# EAGLE board MasterPCB_Rev_1 (EAGLE 9.6.2), part 1 of 5
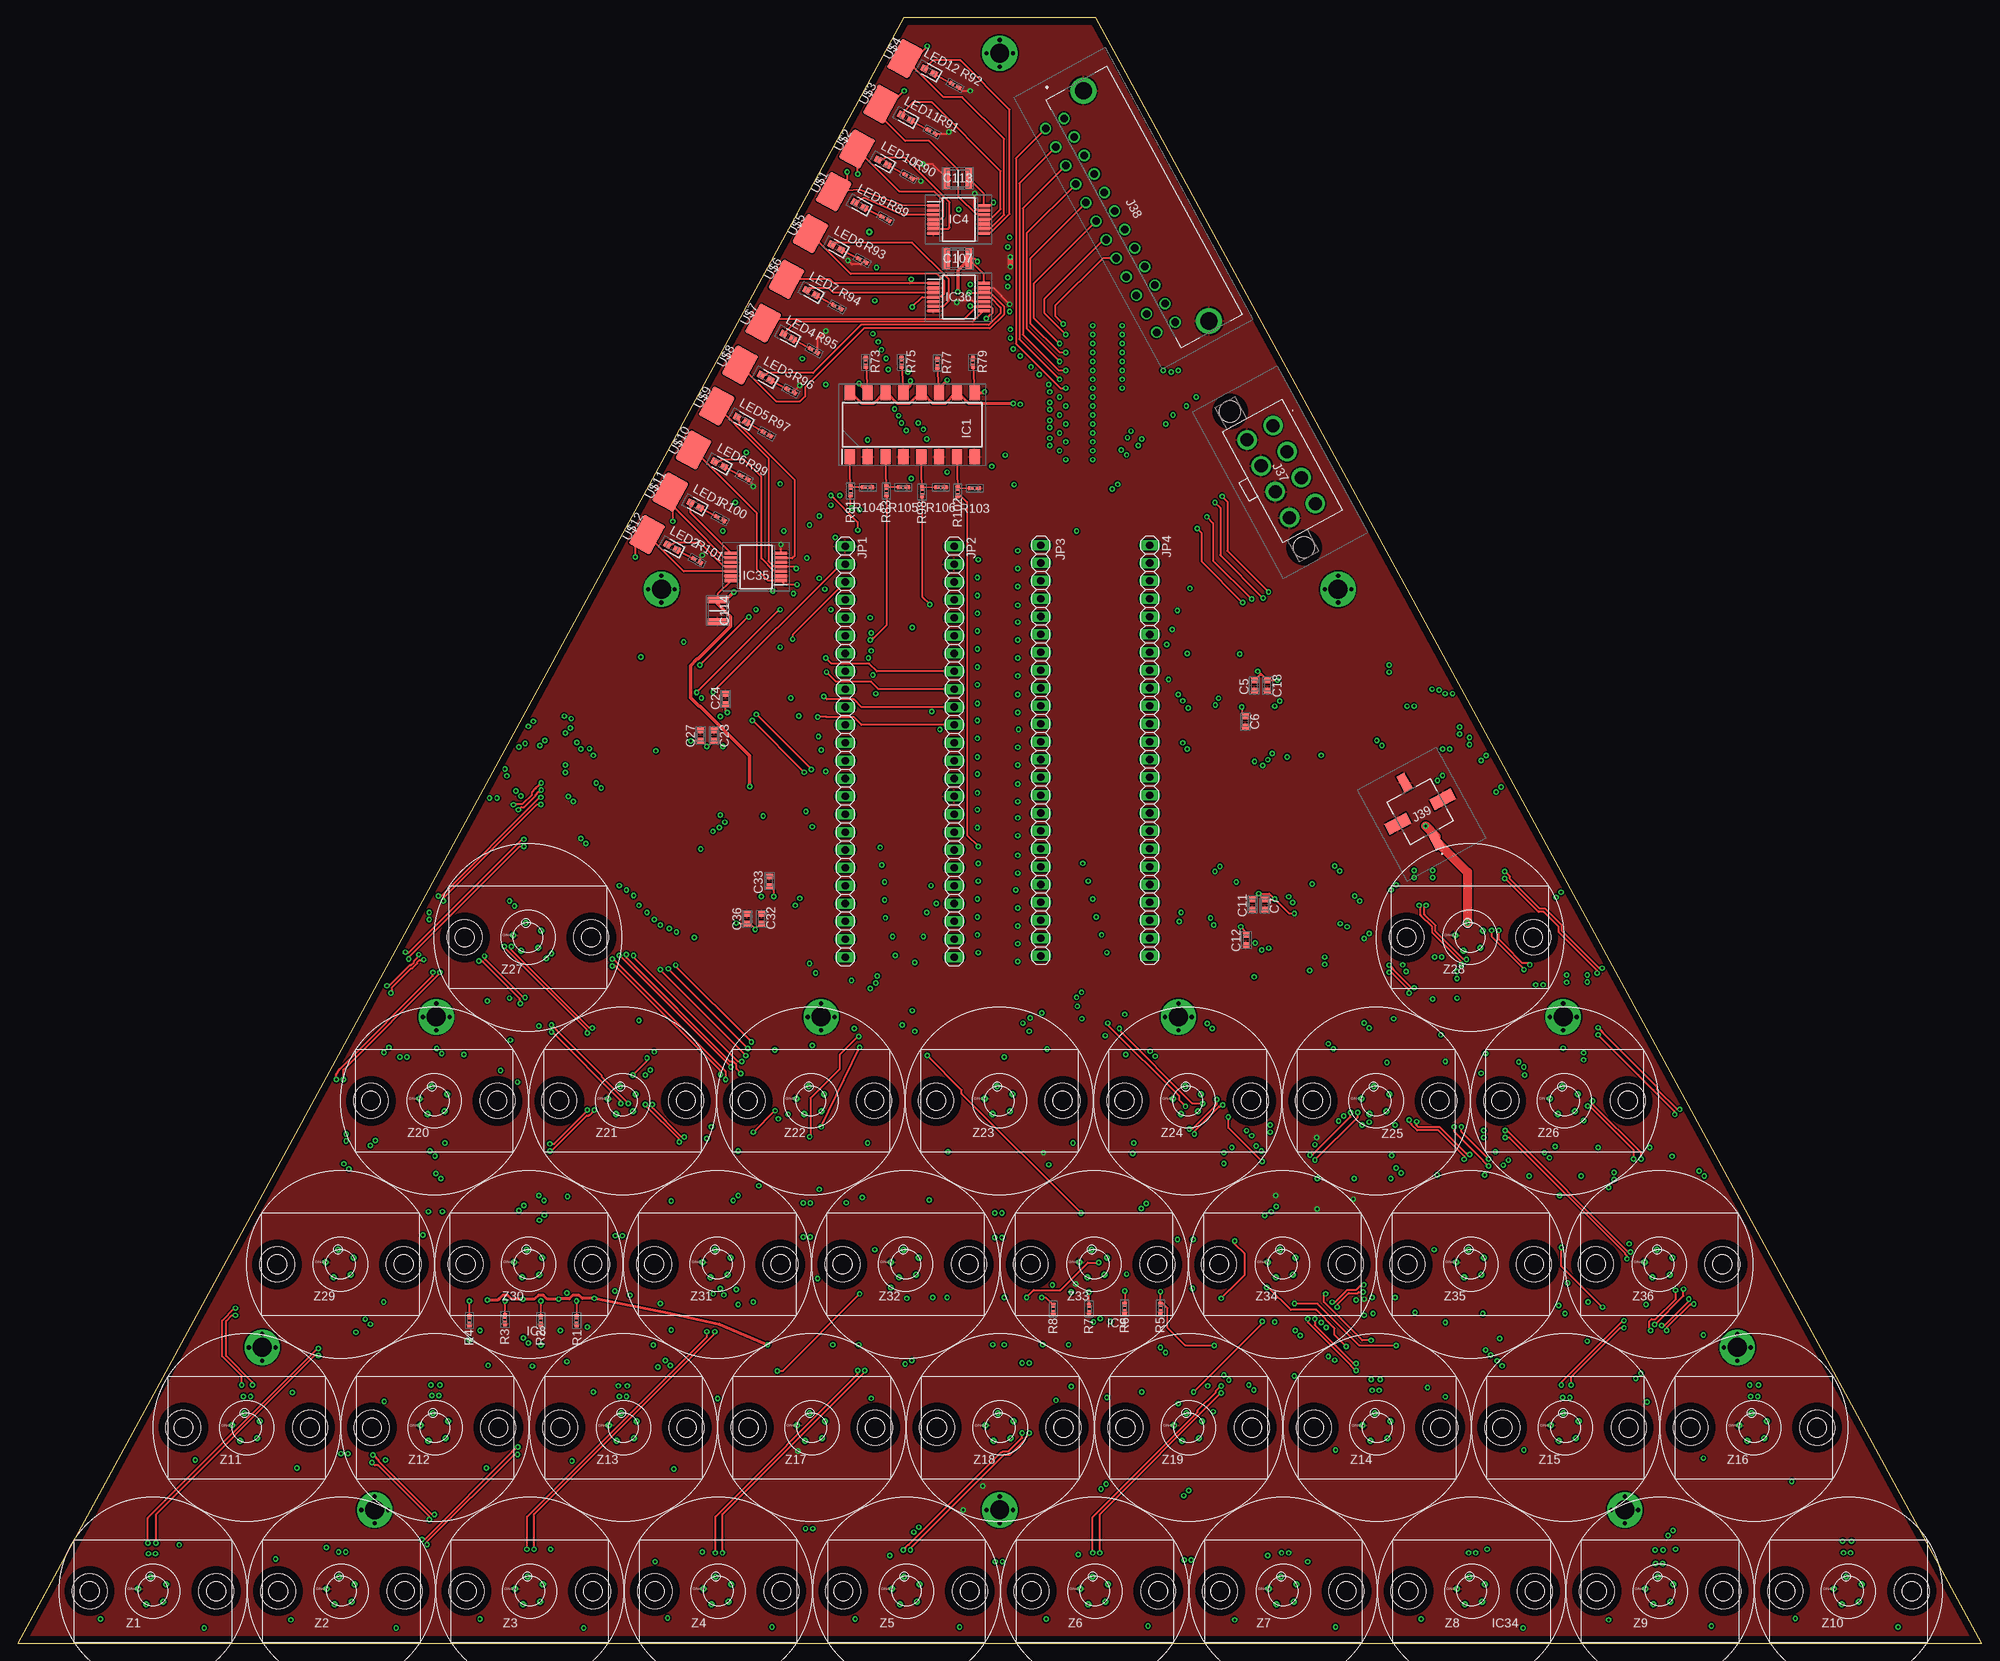
[diagram p0: board, top side]
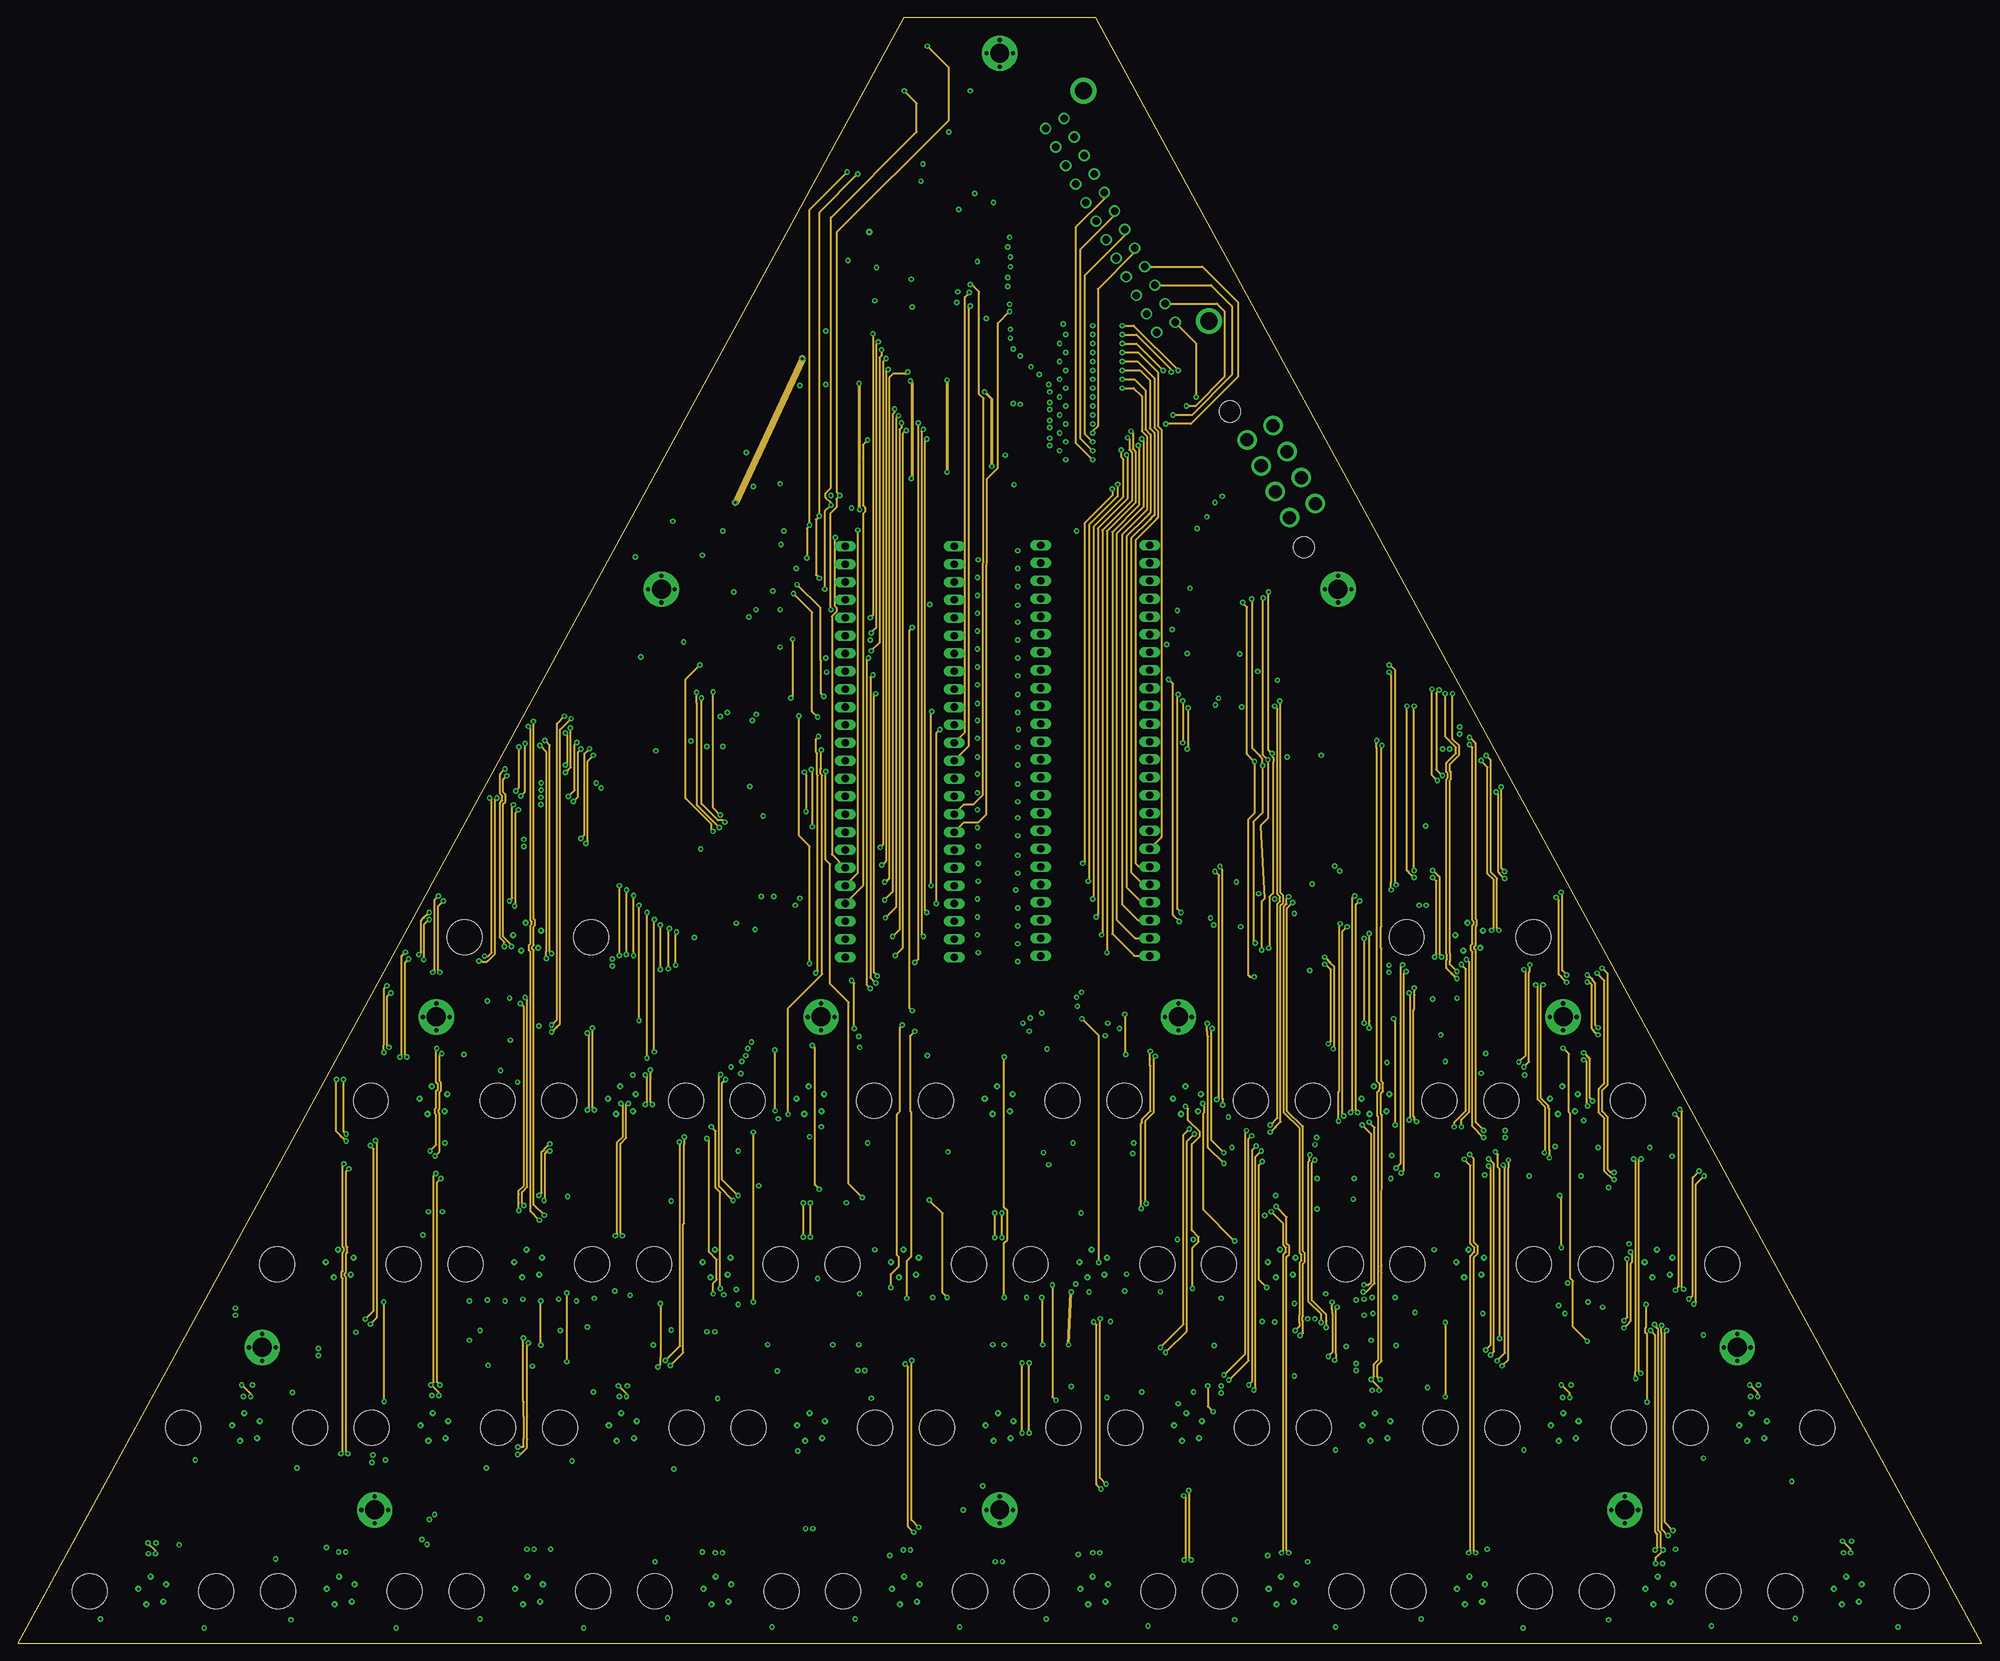
[diagram p1: board, inner layer Route2]
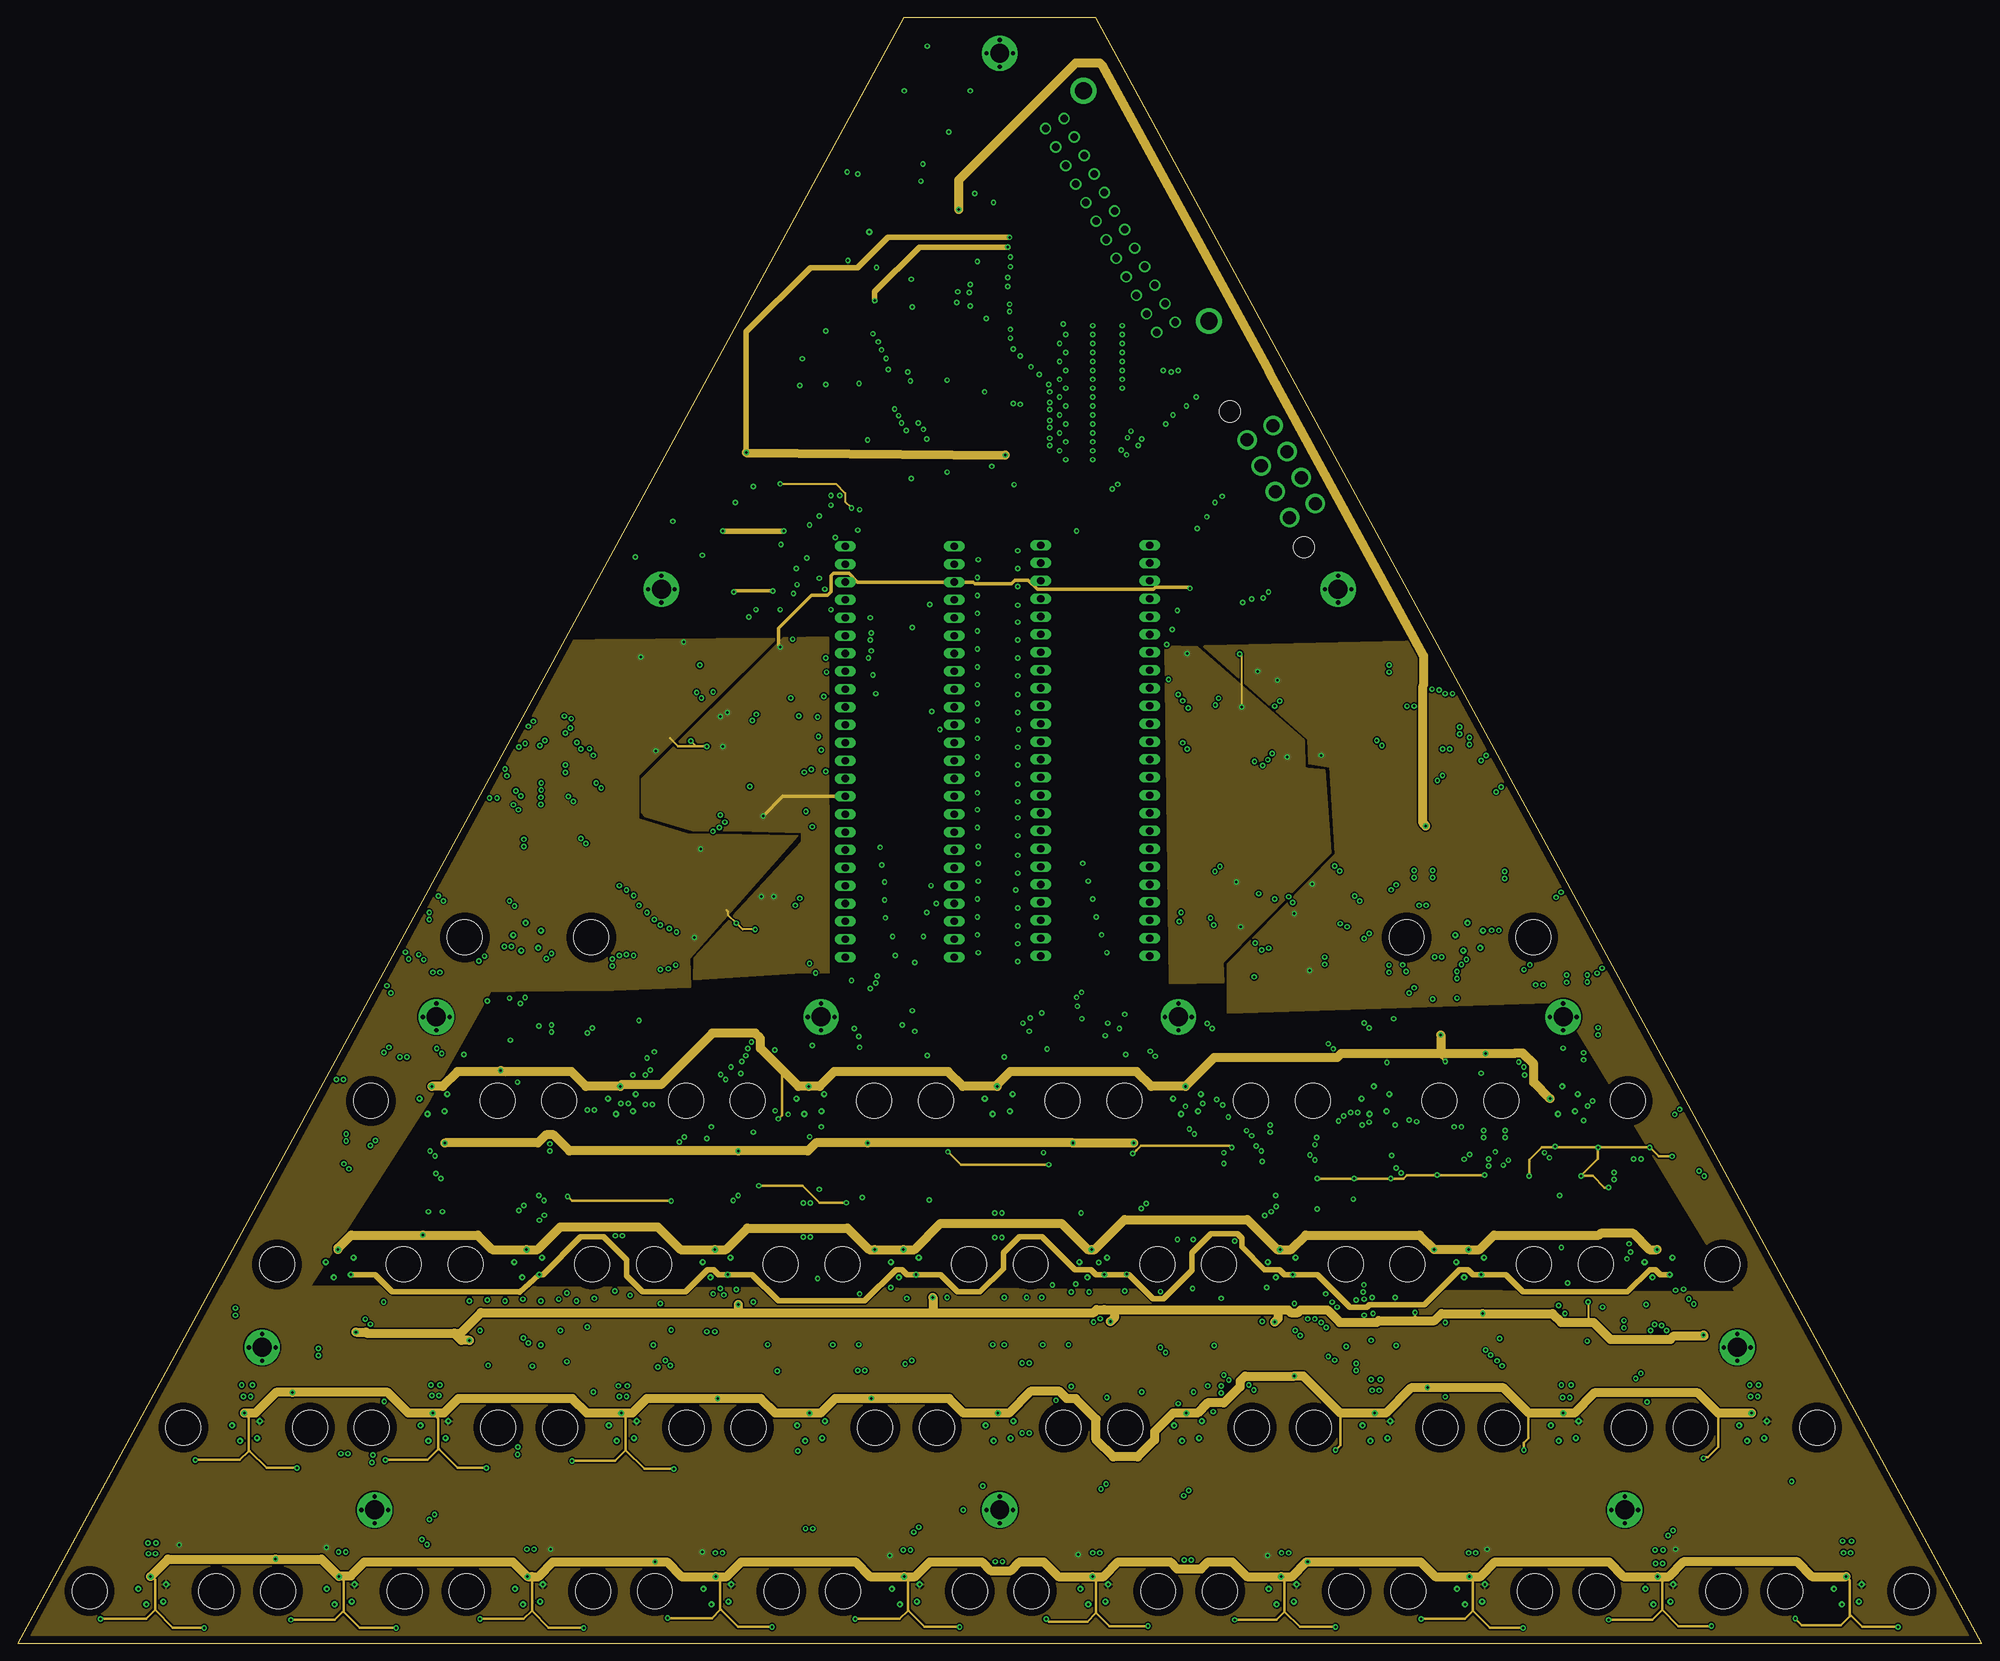
[diagram p2: board, inner layer Route3]
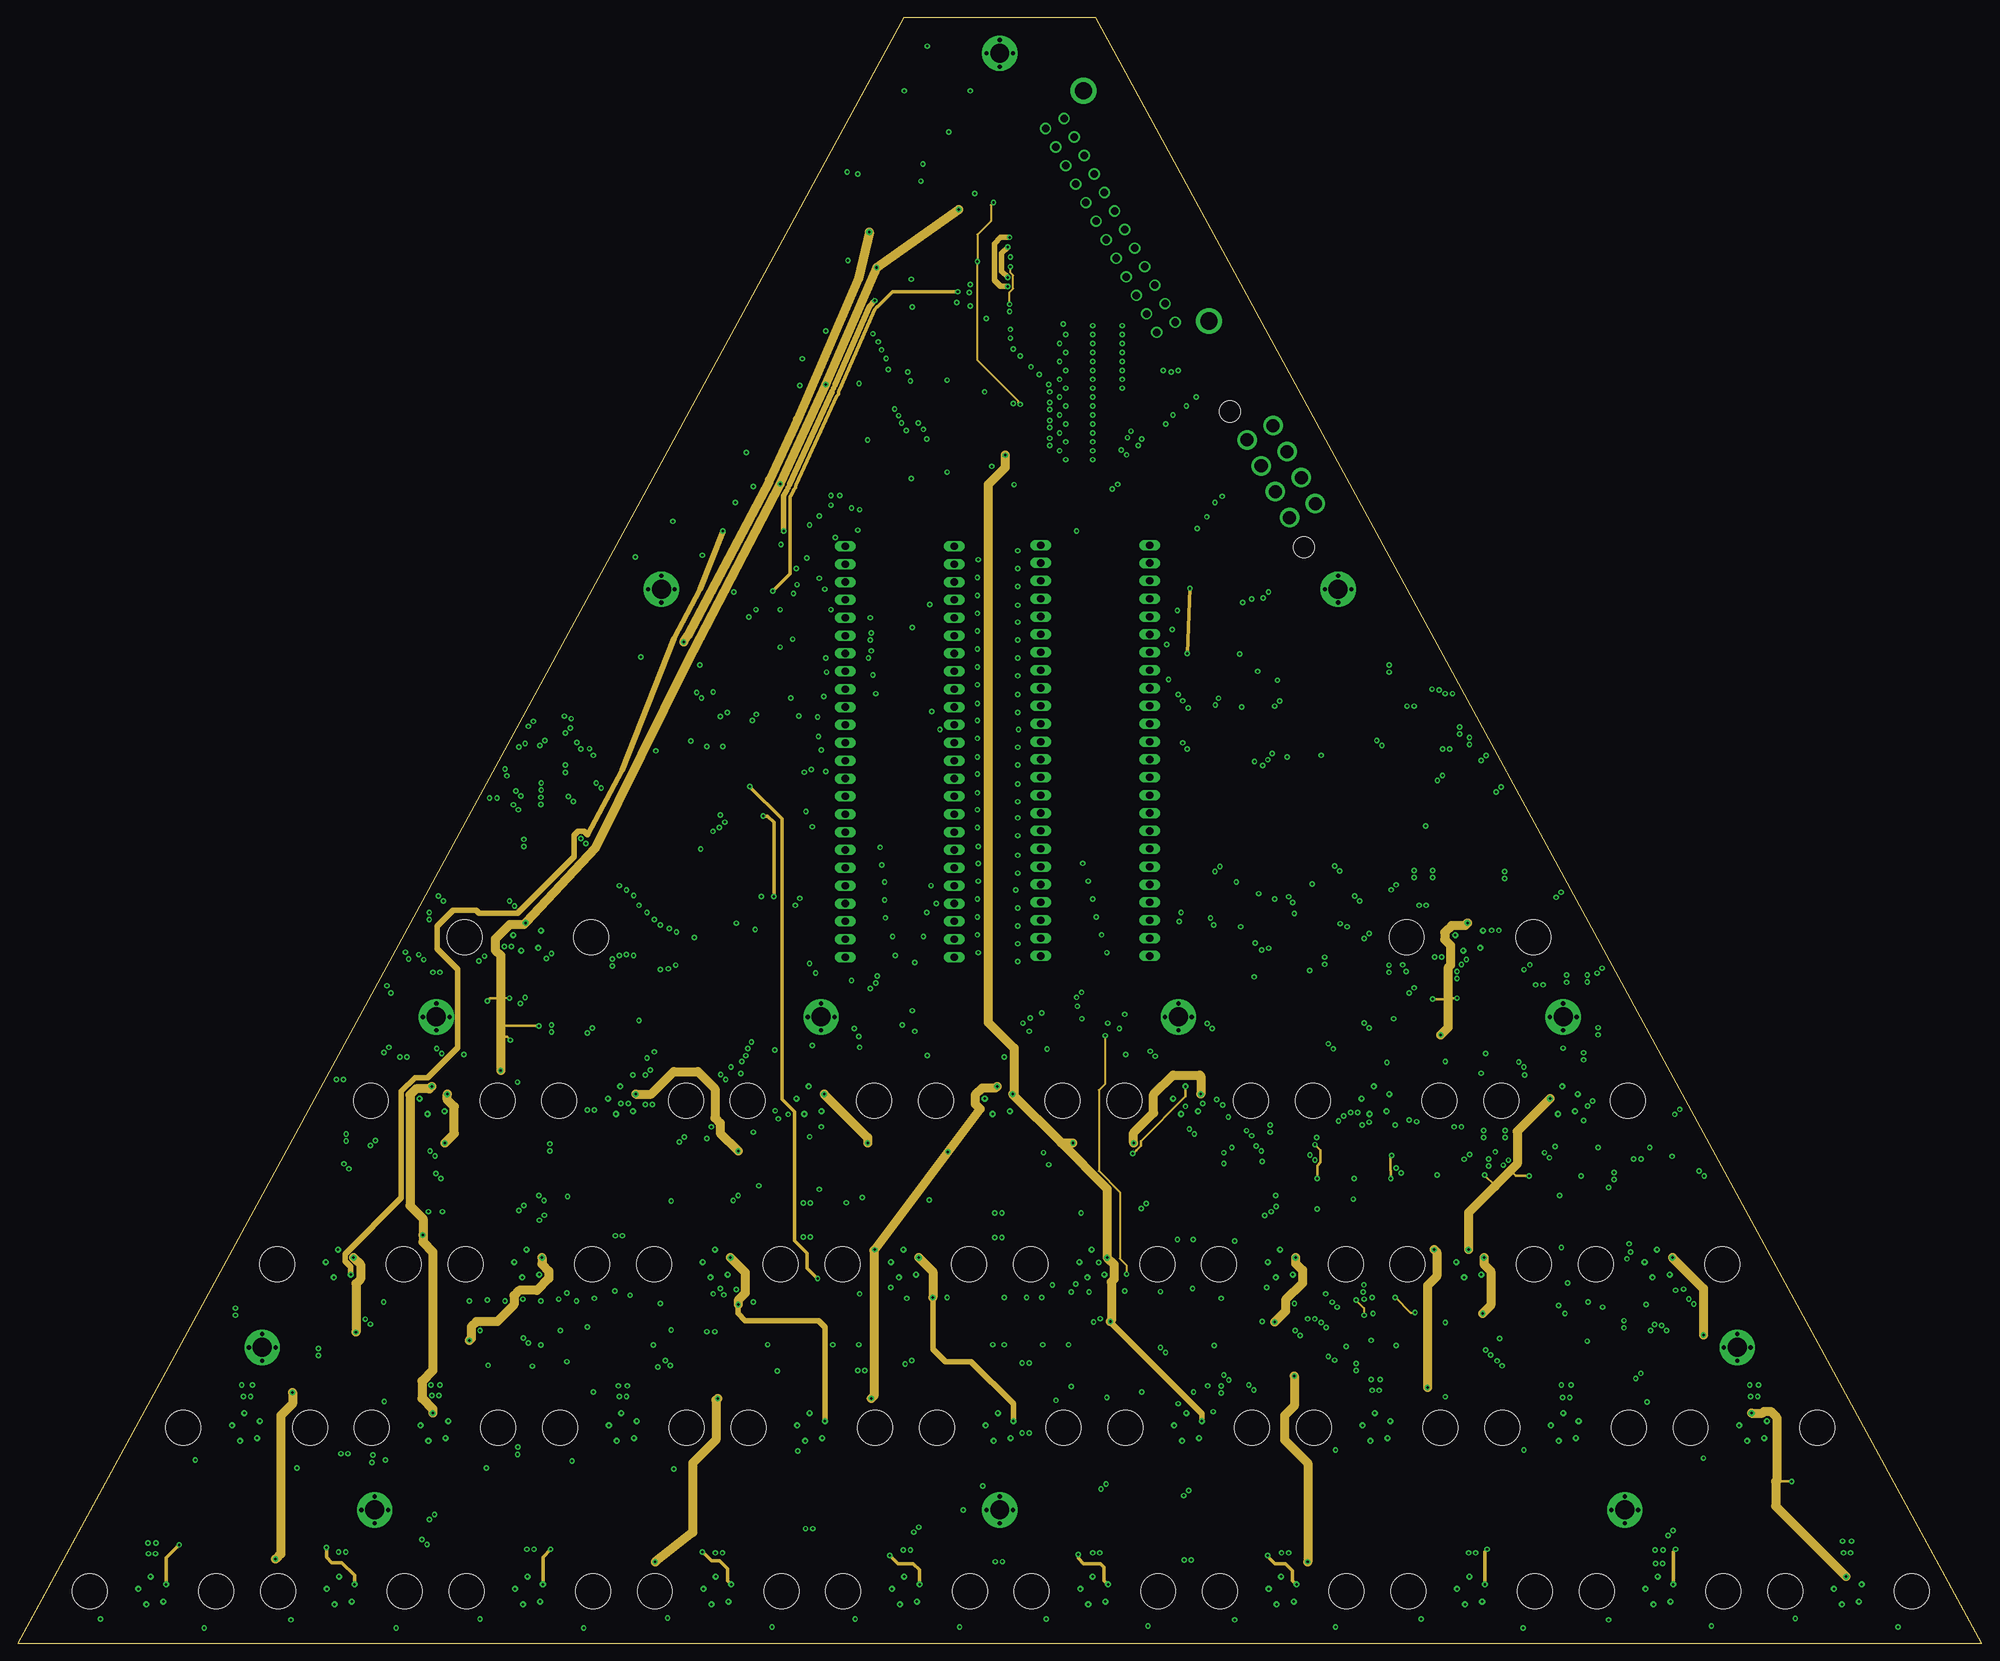
[diagram p3: board, inner layer Route14]
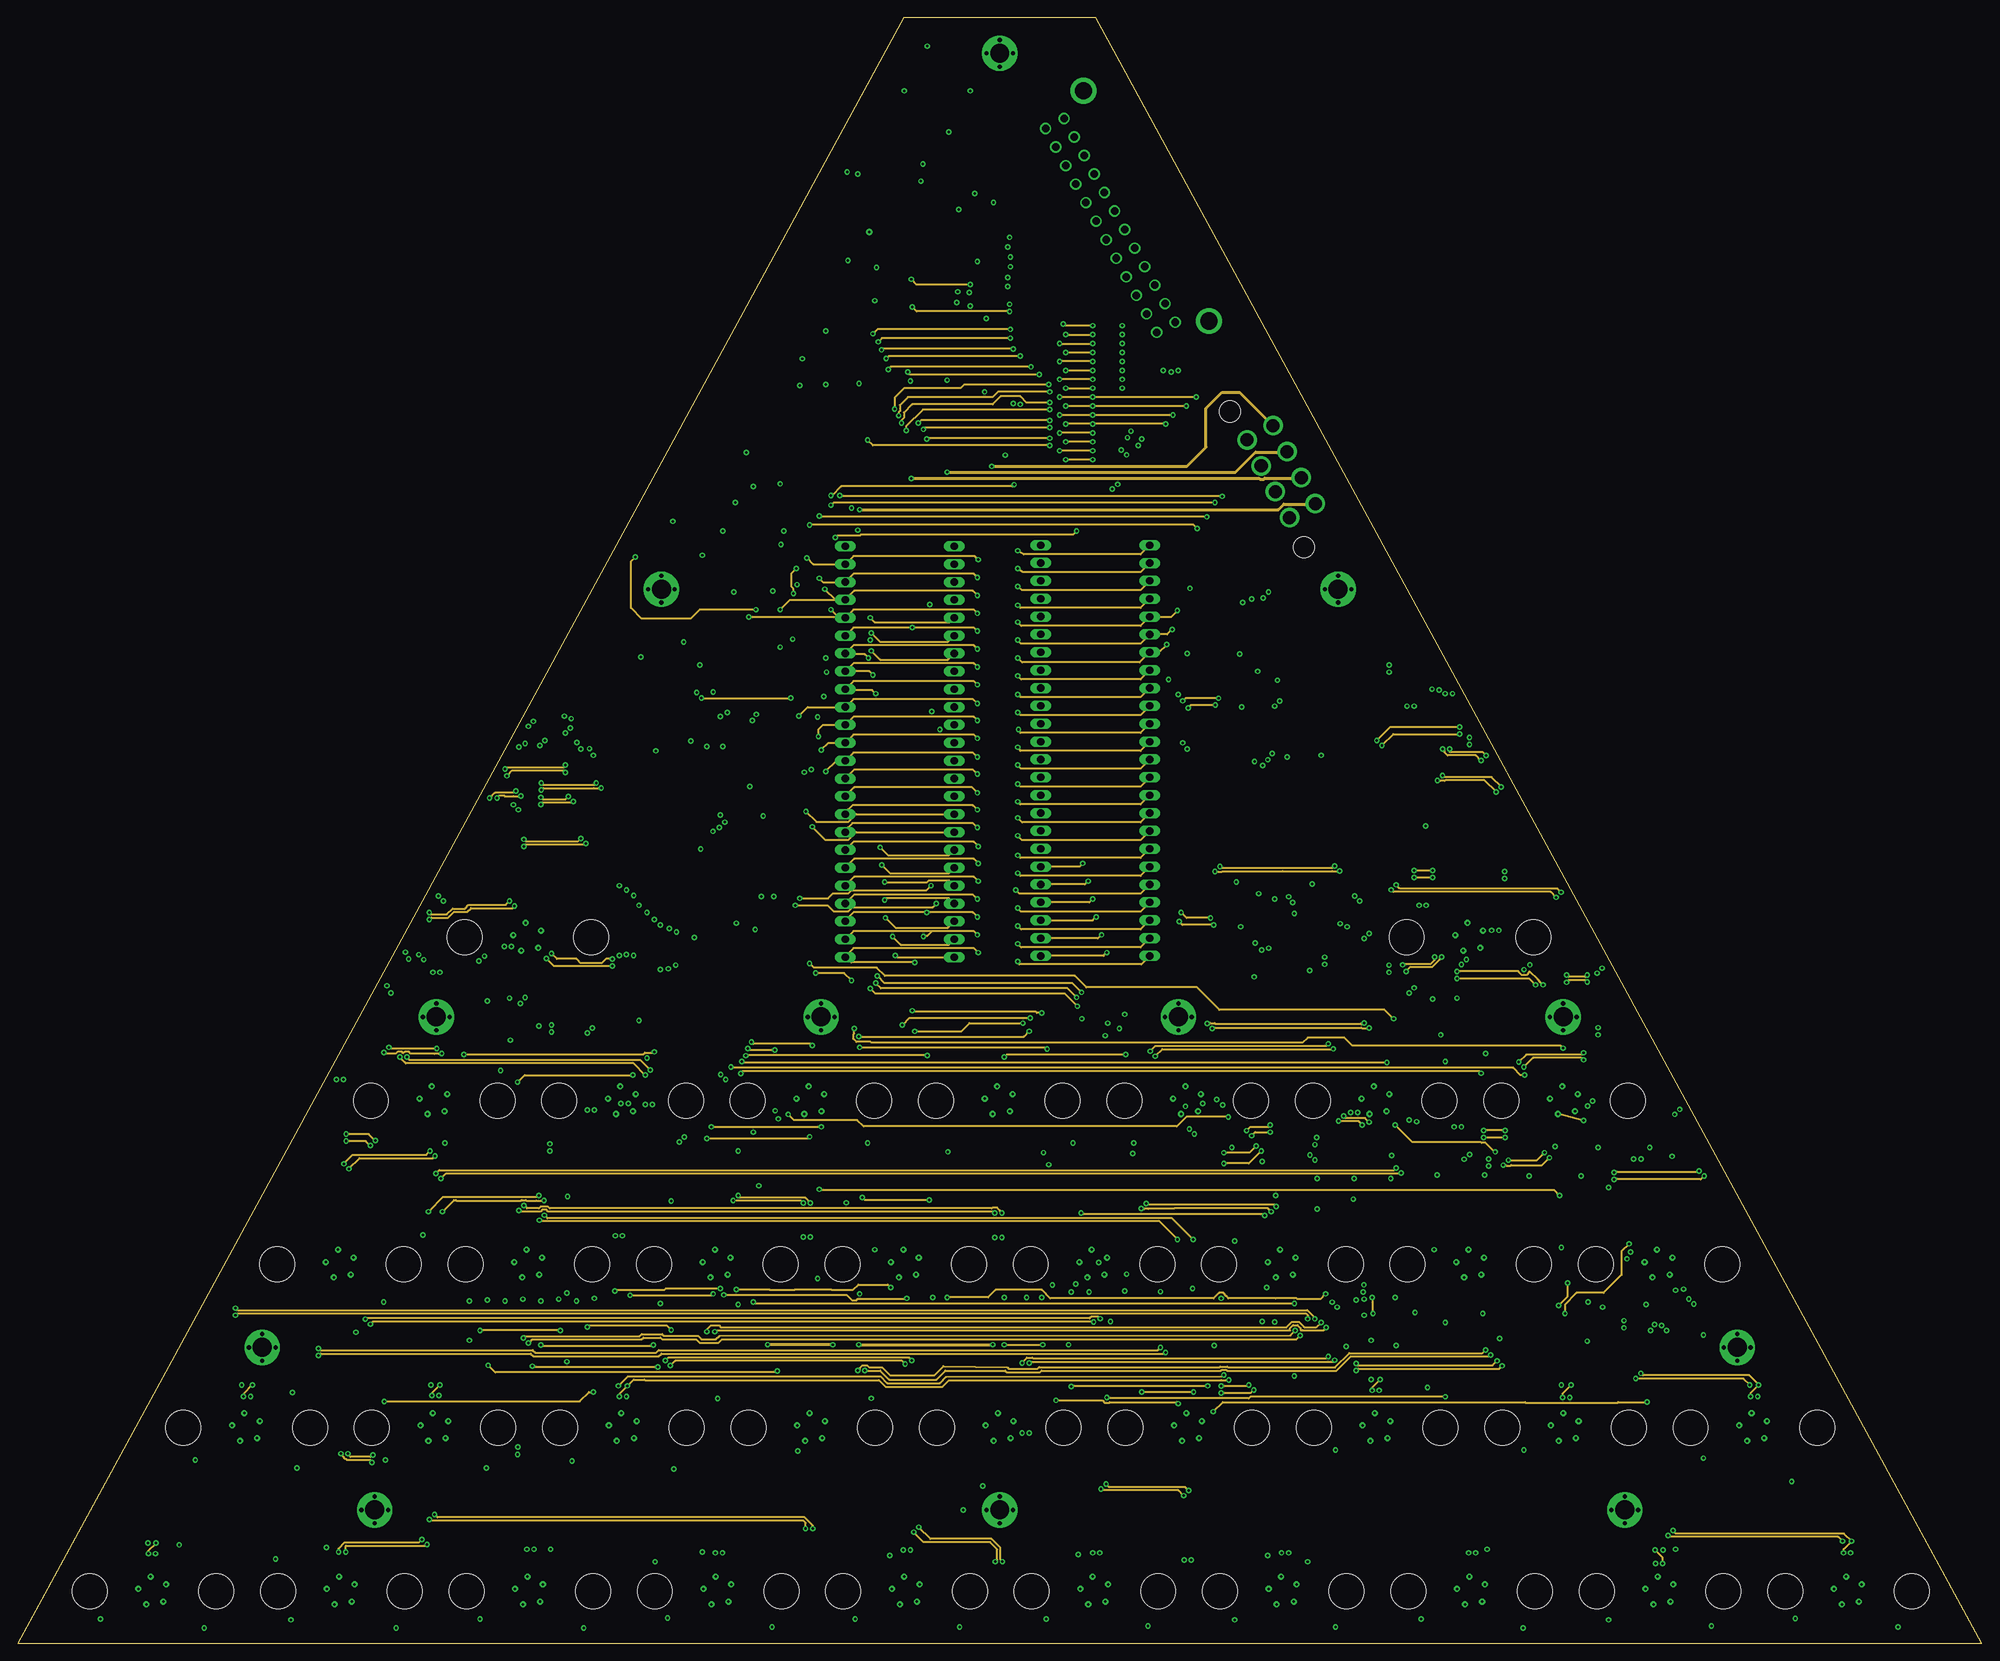
[diagram p4: board, inner layer Route15]
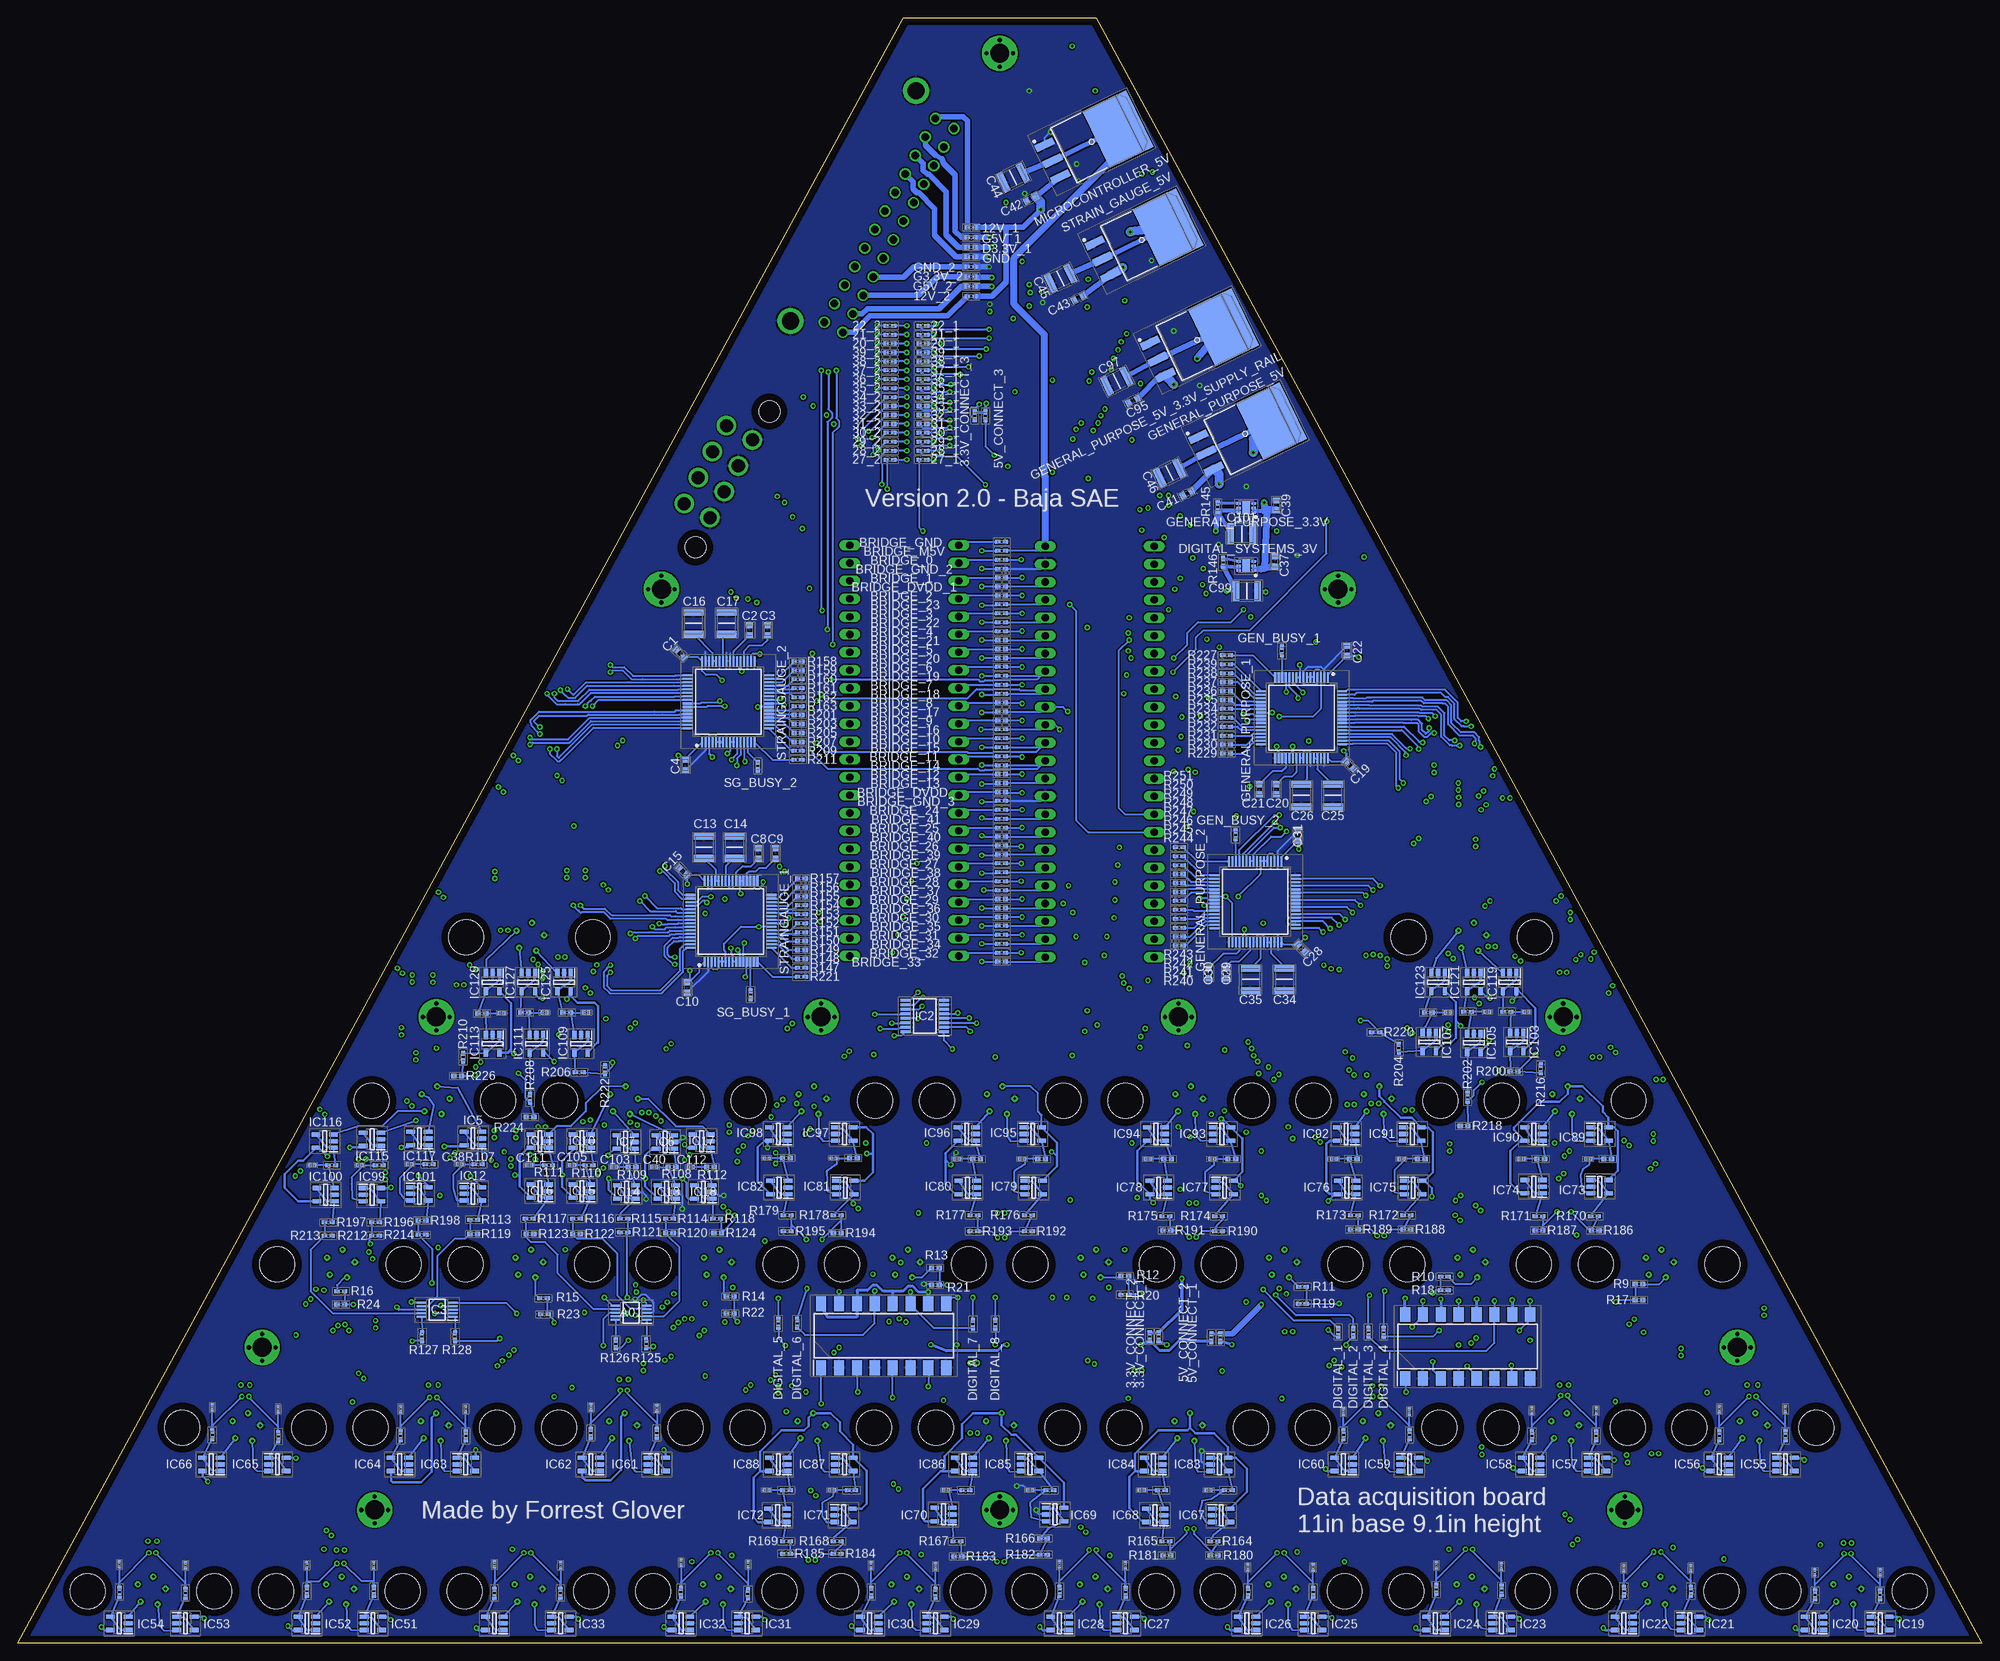
[diagram p5: board, bottom side, seen from below]

Size 279.4 x 231.14 mm. Coordinates in mm from the lower left corner, seen from the top.
Outline: 0,0 279.4,0 153.42,231.14 125.98,231.14 0,0
Copper layers (1+2*3+14*15+16): Top 0.035mm / dielectric 0.1mm / Route2 0.0175mm / dielectric 0.665mm / Route3 0.0175mm / dielectric 0.2mm / Route14 0.0175mm / dielectric 0.665mm / Route15 0.0175mm / dielectric 0.1mm / Bottom 0.035mm
Design rules "default *": minimum track width 10mil, minimum drill 0.35mm, track to track 8mil, track to pad 8mil, pad to pad 6mil, via to via 10mil, smd to smd 6mil, copper to edge 40mil, drill to drill 6mil, minimum pad ring 10mil, minimum via ring 8mil, stop-mask expansion 4mil, vias tented up to drill 15mil, thermal gap 10mil

## Footprints (pad centres in the part's own frame; a part is rotated, then mirrored left to right if it is on the bottom)
RESC1005X40N = smd 0.75 x 0.6: 1 -0.55,0; 2 0.55,0
SOP50P490X110-10N = smd 1.4 x 0.3: 1 -2.2,1; 2 -2.2,0.5; 3 -2.2,0; 4 -2.2,-0.5; 5 -2.2,-1; 6 2.2,-1; 7 2.2,-0.5; 8 2.2,0; 9 2.2,0.5; 10 2.2,1
CAPC1608X90N = smd 0.78 x 0.99: 1 -0.7,0; 2 0.7,0
CAPC3225X230N = smd 0.92 x 2.82: 1 -1.54,0; 2 1.54,0
CAPC0603X33N = smd 0.47 x 0.44: 1 -0.335,0; 2 0.335,0
SON65P200X200X80-7N = smd 0.65 x 0.35: 1 -1.05,0.65; 2 -1.05,0; 3 -1.05,-0.65; 4 1.05,-0.65; 5 1.05,0; 6 1.05,0.65 | smd 1.1 x 1.7: 7 0,0
QFP50P1200X1200X160-64N = smd 1.475 x 0.3: 1 -5.738,3.75; 2 -5.738,3.25; 3 -5.738,2.75; 4 -5.738,2.25; 5 -5.738,1.75; 6 -5.738,1.25; 7 -5.738,0.75; 8 -5.738,0.25; 9 -5.738,-0.25; 10 -5.738,-0.75; 11 -5.738,-1.25; 12 -5.738,-1.75; 13 -5.738,-2.25; 14 -5.738,-2.75; 15 -5.738,-3.25; 16 -5.738,-3.75; 33 5.738,-3.75; 34 5.738,-3.25; 35 5.738,-2.75; 36 5.738,-2.25; 37 5.738,-1.75; 38 5.738,-1.25; 39 5.738,-0.75; 40 5.738,-0.25; 41 5.738,0.25; 42 5.738,0.75; 43 5.738,1.25; 44 5.738,1.75; 45 5.738,2.25; 46 5.738,2.75; 47 5.738,3.25; 48 5.738,3.75 | smd 0.3 x 1.475: 17 -3.75,-5.738; 18 -3.25,-5.738; 19 -2.75,-5.738; 20 -2.25,-5.738; 21 -1.75,-5.738; 22 -1.25,-5.738; 23 -0.75,-5.738; 24 -0.25,-5.738; 25 0.25,-5.738; 26 0.75,-5.738; 27 1.25,-5.738; 28 1.75,-5.738; 29 2.25,-5.738; 30 2.75,-5.738; 31 3.25,-5.738; 32 3.75,-5.738; 49 3.75,5.738; 50 3.25,5.738; 51 2.75,5.738; 52 2.25,5.738; 53 1.75,5.738; 54 1.25,5.738; 55 0.75,5.738; 56 0.25,5.738; 57 -0.25,5.738; 58 -0.75,5.738; 59 -1.25,5.738; 60 -1.75,5.738; 61 -2.25,5.738; 62 -2.75,5.738; 63 -3.25,5.738; 64 -3.75,5.738
TO254P1435X464-4N = smd 2.8 x 1.05: 1 -6.2,2.54; 2 -6.2,0; 3 -6.2,-2.54 | smd 6.85 x 8.95: 4 4.15,0
SOP254P1016X460-16N = smd 2.1 x 1.45: 1 -4.55,8.89; 2 -4.55,6.35; 3 -4.55,3.81; 4 -4.55,1.27; 5 -4.55,-1.27; 6 -4.55,-3.81; 7 -4.55,-6.35; 8 -4.55,-8.89; 9 4.55,-8.89; 10 4.55,-6.35; 11 4.55,-3.81; 12 4.55,-1.27; 13 4.55,1.27; 14 4.55,3.81; 15 4.55,6.35; 16 4.55,8.89
SOP64P600X175-16N = smd 1.528 x 0.435: 1 -2.711,2.222; 2 -2.711,1.588; 3 -2.711,0.952; 4 -2.711,0.318; 5 -2.711,-0.318; 6 -2.711,-0.952; 7 -2.711,-1.588; 8 -2.711,-2.222; 9 2.711,-2.222; 10 2.711,-1.588; 11 2.711,-0.952; 12 2.711,-0.318; 13 2.711,0.318; 14 2.711,0.952; 15 2.711,1.588; 16 2.711,2.222
SOP65P780X200-14N = smd 1.8 x 0.45: 1 -3.55,1.95; 2 -3.55,1.3; 3 -3.55,0.65; 4 -3.55,0; 5 -3.55,-0.65; 6 -3.55,-1.3; 7 -3.55,-1.95; 8 3.55,-1.95; 9 3.55,-1.3; 10 3.55,-0.65; 11 3.55,0; 12 3.55,0.65; 13 3.55,1.3; 14 3.55,1.95
SOT95P275X110-5N = smd 1.25 x 0.6: 1 -1.25,0.95; 2 -1.25,0; 3 -1.25,-0.95; 4 1.25,-0.95; 5 1.25,0.95
462070008 = drill 1.85 pad 2.775: 1 0,0; 2 -4.2,0; 3 -8.4,0; 4 -12.6,0; 5 0,4.2; 6 -4.2,4.2; 7 -8.4,4.2; 8 -12.6,4.2 | hole 3.03: 4.7,4.391; -17.3,4.391
430452422 = drill 1.07 pad 1.605: 1 0,0; 2 -3,0; 3 -6,0; 4 -9,0; 5 -12,0; 6 -15,0; 7 -18,0; 8 -21,0; 9 -24,0; 10 -27,0; 11 -30,0; 12 -33,0; 13 0,3; 14 -3,3; 15 -6,3; 16 -9,3; 17 -12,3; 18 -15,3; 19 -18,3; 20 -21,3; 21 -24,3; 22 -27,3; 23 -30,3; 24 -33,3 | drill 2.46 pad 3.69: MH1 2.15,-4.32; MH2 -35.15,-4.32
37946362 = smd 1.27 x 2.54: 1 0,-4.7; 2 0,4.7 | smd 3.43 x 1.65: MP1 3.635,0; MP2 -3.635,0
1X24 = drill 1.016 long: 1 -29.21,0; 2 -26.67,0; 3 -24.13,0; 4 -21.59,0; 5 -19.05,0; 6 -16.51,0; 7 -13.97,0; 8 -11.43,0; 9 -8.89,0; 10 -6.35,0; 11 -3.81,0; 12 -1.27,0; 13 1.27,0; 14 3.81,0; 15 6.35,0; 16 8.89,0; 17 11.43,0; 18 13.97,0; 19 16.51,0; 20 19.05,0; 21 21.59,0; 22 24.13,0; 23 26.67,0; 24 29.21,0
LEDC1608X80N = smd 1 x 0.95: 1 -0.75,0; 2 0.75,0
5/64IN = drill 2.7 pad 5: 5/64 0,0 | drill 0.6 square: P$1 0,-1.9; P$2 1.9,0; P$3 0,1.9; P$4 -1.9,0
RESC1005X35N = smd 0.75 x 0.6: 1 -0.55,0; 2 0.55,0
TEST_PAD = smd 4.7 x 3.43: TP 0,0
AS_FEMALE_5_PIN = drill 0.35 pad 0.61: P$1 9.17,7.57; P$2 10.92,9.32; P$3 13.12,8.2; P$4 12.73,5.77; P$5 10.3,5.38 | hole 5: 2.25,7.25; 20.25,7.25

## Placement (x,y rotation side)
3.3V_CONNECT_1  RCS04020000Z0ED  [RESC1005X40N]  117.09,43.56 90 bottom
3.3V_CONNECT_2  RCS04020000Z0ED  [RESC1005X40N]  118.36,43.56 90 bottom
3.3V_CONNECT_3  RCS04020000Z0ED  [RESC1005X40N]  143.26,174.5 270 bottom
5V_CONNECT_1  RCS04020000Z0ED  [RESC1005X40N]  108.33,43.43 90 bottom
5V_CONNECT_2  RCS04020000Z0ED  [RESC1005X40N]  109.6,43.43 90 bottom
5V_CONNECT_3  RCS04020000Z0ED  [RESC1005X40N]  141.73,174.5 270 bottom
12V_1  RCS04020000Z0ED  [RESC1005X40N]  143.76,201.29 0 bottom
12V_2  RCS04020000Z0ED  [RESC1005X40N]  143.76,191.52 0 bottom
20_1  RCS04020000Z0ED  [RESC1005X40N]  150.62,184.78 180 bottom
20_2  RCS04020000Z0ED  [RESC1005X40N]  155.32,184.78 180 bottom
21_1  RCS04020000Z0ED  [RESC1005X40N]  150.62,186.06 180 bottom
21_2  RCS04020000Z0ED  [RESC1005X40N]  155.32,186.06 180 bottom
22_1  RCS04020000Z0ED  [RESC1005X40N]  150.62,187.32 180 bottom
22_2  RCS04020000Z0ED  [RESC1005X40N]  155.32,187.32 180 bottom
27_1  RCS04020000Z0ED  [RESC1005X40N]  150.62,168.28 180 bottom
27_2  RCS04020000Z0ED  [RESC1005X40N]  155.32,168.28 180 bottom
28_1  RCS04020000Z0ED  [RESC1005X40N]  150.62,169.54 180 bottom
28_2  RCS04020000Z0ED  [RESC1005X40N]  155.32,169.54 180 bottom
29_1  RCS04020000Z0ED  [RESC1005X40N]  150.62,170.81 180 bottom
29_2  RCS04020000Z0ED  [RESC1005X40N]  155.32,170.81 180 bottom
30_1  RCS04020000Z0ED  [RESC1005X40N]  150.62,172.09 180 bottom
30_2  RCS04020000Z0ED  [RESC1005X40N]  155.32,172.09 180 bottom
31_1  RCS04020000Z0ED  [RESC1005X40N]  150.62,173.35 180 bottom
31_2  RCS04020000Z0ED  [RESC1005X40N]  155.32,173.35 180 bottom
32_1  RCS04020000Z0ED  [RESC1005X40N]  150.62,174.62 180 bottom
32_2  RCS04020000Z0ED  [RESC1005X40N]  155.32,174.62 180 bottom
33_1  RCS04020000Z0ED  [RESC1005X40N]  150.62,175.9 180 bottom
33_2  RCS04020000Z0ED  [RESC1005X40N]  155.32,175.9 180 bottom
34_1  RCS04020000Z0ED  [RESC1005X40N]  150.62,177.16 180 bottom
34_2  RCS04020000Z0ED  [RESC1005X40N]  155.32,177.16 180 bottom
35_1  RCS04020000Z0ED  [RESC1005X40N]  150.62,178.44 180 bottom
35_2  RCS04020000Z0ED  [RESC1005X40N]  155.32,178.44 180 bottom
36_1  RCS04020000Z0ED  [RESC1005X40N]  150.62,179.71 180 bottom
36_2  RCS04020000Z0ED  [RESC1005X40N]  155.32,179.71 180 bottom
37_1  RCS04020000Z0ED  [RESC1005X40N]  150.62,180.97 180 bottom
37_2  RCS04020000Z0ED  [RESC1005X40N]  155.32,180.97 180 bottom
38_1  RCS04020000Z0ED  [RESC1005X40N]  150.62,182.25 180 bottom
38_2  RCS04020000Z0ED  [RESC1005X40N]  155.32,182.25 180 bottom
39_1  RCS04020000Z0ED  [RESC1005X40N]  150.62,183.51 180 bottom
39_2  RCS04020000Z0ED  [RESC1005X40N]  155.32,183.51 180 bottom
A01  TMUX1104DGSR  [SOP50P490X110-10N]  192.15,46.99 180 bottom
BRIDGE_0  RCS04020000Z0ED  [RESC1005X40N]  139.45,154.05 180 bottom
BRIDGE_1  RCS04020000Z0ED  [RESC1005X40N]  139.45,151.51 180 bottom
BRIDGE_2  RCS04020000Z0ED  [RESC1005X40N]  139.45,148.97 180 bottom
BRIDGE_3  RCS04020000Z0ED  [RESC1005X40N]  139.45,146.43 180 bottom
BRIDGE_4  RCS04020000Z0ED  [RESC1005X40N]  139.45,143.89 180 bottom
BRIDGE_5  RCS04020000Z0ED  [RESC1005X40N]  139.45,141.35 180 bottom
BRIDGE_6  RCS04020000Z0ED  [RESC1005X40N]  139.45,138.81 180 bottom
BRIDGE_7  RCS04020000Z0ED  [RESC1005X40N]  139.45,136.27 180 bottom
BRIDGE_8  RCS04020000Z0ED  [RESC1005X40N]  139.45,133.73 180 bottom
BRIDGE_9  RCS04020000Z0ED  [RESC1005X40N]  139.45,131.19 180 bottom
BRIDGE_10  RCS04020000Z0ED  [RESC1005X40N]  139.45,128.65 180 bottom
BRIDGE_11  RCS04020000Z0ED  [RESC1005X40N]  139.45,126.11 180 bottom
BRIDGE_12  RCS04020000Z0ED  [RESC1005X40N]  139.45,123.57 180 bottom
BRIDGE_13  RCS04020000Z0ED  [RESC1005X40N]  139.45,122.3 180 bottom
BRIDGE_14  RCS04020000Z0ED  [RESC1005X40N]  139.45,124.84 180 bottom
BRIDGE_15  RCS04020000Z0ED  [RESC1005X40N]  139.45,127.38 180 bottom
BRIDGE_16  RCS04020000Z0ED  [RESC1005X40N]  139.45,129.92 180 bottom
BRIDGE_17  RCS04020000Z0ED  [RESC1005X40N]  139.45,132.46 180 bottom
BRIDGE_18  RCS04020000Z0ED  [RESC1005X40N]  139.45,135 180 bottom
BRIDGE_19  RCS04020000Z0ED  [RESC1005X40N]  139.45,137.54 180 bottom
BRIDGE_20  RCS04020000Z0ED  [RESC1005X40N]  139.45,140.08 180 bottom
BRIDGE_21  RCS04020000Z0ED  [RESC1005X40N]  139.45,142.62 180 bottom
BRIDGE_22  RCS04020000Z0ED  [RESC1005X40N]  139.45,145.16 180 bottom
BRIDGE_23  RCS04020000Z0ED  [RESC1005X40N]  139.45,147.7 180 bottom
BRIDGE_24  RCS04020000Z0ED  [RESC1005X40N]  139.45,118.49 180 bottom
BRIDGE_25  RCS04020000Z0ED  [RESC1005X40N]  139.45,115.95 180 bottom
BRIDGE_26  RCS04020000Z0ED  [RESC1005X40N]  139.45,113.41 180 bottom
BRIDGE_27  RCS04020000Z0ED  [RESC1005X40N]  139.45,110.87 180 bottom
BRIDGE_28  RCS04020000Z0ED  [RESC1005X40N]  139.45,108.33 180 bottom
BRIDGE_29  RCS04020000Z0ED  [RESC1005X40N]  139.45,105.79 180 bottom
BRIDGE_30  RCS04020000Z0ED  [RESC1005X40N]  139.45,103.25 180 bottom
BRIDGE_31  RCS04020000Z0ED  [RESC1005X40N]  139.45,100.71 180 bottom
BRIDGE_32  RCS04020000Z0ED  [RESC1005X40N]  139.45,98.17 180 bottom
BRIDGE_33  RCS04020000Z0ED  [RESC1005X40N]  139.45,96.9 180 bottom
BRIDGE_34  RCS04020000Z0ED  [RESC1005X40N]  139.45,99.44 180 bottom
BRIDGE_35  RCS04020000Z0ED  [RESC1005X40N]  139.45,101.98 180 bottom
BRIDGE_36  RCS04020000Z0ED  [RESC1005X40N]  139.45,104.52 180 bottom
BRIDGE_37  RCS04020000Z0ED  [RESC1005X40N]  139.45,107.06 180 bottom
BRIDGE_38  RCS04020000Z0ED  [RESC1005X40N]  139.45,109.6 180 bottom
BRIDGE_39  RCS04020000Z0ED  [RESC1005X40N]  139.45,112.14 180 bottom
BRIDGE_40  RCS04020000Z0ED  [RESC1005X40N]  139.45,114.68 180 bottom
BRIDGE_41  RCS04020000Z0ED  [RESC1005X40N]  139.45,117.22 180 bottom
BRIDGE_DVDD  RCS04020000Z0ED  [RESC1005X40N]  139.45,121.03 180 bottom
BRIDGE_DVDD_1  RCS04020000Z0ED  [RESC1005X40N]  139.45,150.24 180 bottom
BRIDGE_GND  RCS04020000Z0ED  [RESC1005X40N]  139.45,156.59 180 bottom
BRIDGE_GND_2  RCS04020000Z0ED  [RESC1005X40N]  139.45,152.78 180 bottom
BRIDGE_GND_3  RCS04020000Z0ED  [RESC1005X40N]  139.45,119.76 180 bottom
BRIDGE_M5V  RCS04020000Z0ED  [RESC1005X40N]  139.45,155.32 180 bottom
C1  06033C105KAT4A  [CAPC1608X90N]  185.17,140.72 135 bottom
C2  06033C105KAT4A  [CAPC1608X90N]  175.26,144.02 90 bottom
C3  06033C105KAT4A  [CAPC1608X90N]  172.72,144.02 90 bottom
C4  06033C105KAT4A  [CAPC1608X90N]  184.4,124.84 90 bottom
C5  06033C105KAT4A  [CAPC1608X90N]  175.9,136.14 90 top
C6  06033C105KAT4A  [CAPC1608X90N]  174.62,131.06 90 top
C7  06033C105KAT4A  [CAPC1608X90N]  177.42,105.03 270 top
C8  06033C105KAT4A  [CAPC1608X90N]  173.99,112.27 90 bottom
C9  06033C105KAT4A  [CAPC1608X90N]  171.58,112.27 90 bottom
C10  06033C105KAT4A  [CAPC1608X90N]  184.15,93.22 90 bottom
C11  06033C105KAT4A  [CAPC1608X90N]  175.64,105.03 90 top
C12  06033C105KAT4A  [CAPC1608X90N]  174.75,99.95 90 top
C13  C3225X7R1N106K250AC  [CAPC3225X230N]  181.74,113.16 90 bottom
C14  C3225X7R1N106K250AC  [CAPC3225X230N]  177.42,113.16 90 bottom
C15  06033C105KAT4A  [CAPC1608X90N]  184.78,109.73 315 bottom
C16  C3225X7R1N106K250AC  [CAPC3225X230N]  183.26,145.03 90 bottom
C17  C3225X7R1N106K250AC  [CAPC3225X230N]  178.56,145.03 90 bottom
C18  06033C105KAT4A  [CAPC1608X90N]  177.8,136.14 90 top
C19  06033C105KAT4A  [CAPC1608X90N]  89.92,124.84 315 bottom
C20  06033C105KAT4A  [CAPC1608X90N]  100.33,121.41 270 bottom
C21  06033C105KAT4A  [CAPC1608X90N]  102.74,121.41 270 bottom
C22  06033C105KAT4A  [CAPC1608X90N]  90.3,141.1 270 bottom
C23  06033C105KAT4A  [CAPC1608X90N]  99.06,129.03 270 top
C24  06033C105KAT4A  [CAPC1608X90N]  100.71,134.24 270 top
C25  C3225X7R1N106K250AC  [CAPC3225X230N]  92.33,120.52 270 bottom
C26  C3225X7R1N106K250AC  [CAPC3225X230N]  96.77,120.52 270 bottom
C27  06033C105KAT4A  [CAPC1608X90N]  97.16,129.03 270 top
C28  06033C105KAT4A  [CAPC1608X90N]  96.77,98.81 315 bottom
C29  06033C105KAT4A  [CAPC1608X90N]  107.44,95.25 270 bottom
C30  06033C105KAT4A  [CAPC1608X90N]  109.98,95.25 270 bottom
C31  06033C105KAT4A  [CAPC1608X90N]  97.28,114.81 270 bottom
C32  06033C105KAT4A  [CAPC1608X90N]  105.79,103 270 top
C33  06033C105KAT4A  [CAPC1608X90N]  106.93,108.33 270 top
C34  C3225X7R1N106K250AC  [CAPC3225X230N]  99.19,94.36 270 bottom
C35  C3225X7R1N106K250AC  [CAPC3225X230N]  104.01,94.36 270 bottom
C36  06033C105KAT4A  [CAPC1608X90N]  103.76,103 270 top
C37  06033C105KAT4A  [CAPC1608X90N]  100.58,153.8 90 bottom
C38  02013C682KAT2A  [CAPC0603X33N]  216.53,68.07 180 bottom
C39  06033C105KAT4A  [CAPC1608X90N]  100.33,161.8 90 bottom
C40  02013C682KAT2A  [CAPC0603X33N]  188.85,67.69 180 bottom
C41  06033C105KAT4A  [CAPC1608X90N]  113.03,163.45 205.9 bottom
C42  06033C105KAT4A  [CAPC1608X90N]  135.25,205.36 205.9 bottom
C43  06033C105KAT4A  [CAPC1608X90N]  128.52,191.26 205.9 bottom
C44  C3225X7R1N106K250AC  [CAPC3225X230N]  137.79,208.41 205.9 bottom
C45  C3225X7R1N106K250AC  [CAPC3225X230N]  131.06,194.06 205.9 bottom
C46  C3225X7R1N106K250AC  [CAPC3225X230N]  115.57,166.37 205.9 bottom
C47  02013C682KAT2A  [CAPC0603X33N]  211.58,11.18 90 bottom
C48  02013C682KAT2A  [CAPC0603X33N]  202.18,11.05 90 bottom
C49  02013C682KAT2A  [CAPC0603X33N]  185.04,11.43 90 bottom
C50  02013C682KAT2A  [CAPC0603X33N]  175.51,11.18 90 bottom
C51  02013C682KAT2A  [CAPC0603X33N]  157.99,11.05 90 bottom
C52  02013C682KAT2A  [CAPC0603X33N]  148.84,10.92 90 bottom
C53  02013C682KAT2A  [CAPC0603X33N]  131.19,11.18 90 bottom
C54  02013C682KAT2A  [CAPC0603X33N]  121.79,11.05 90 bottom
C55  02013C682KAT2A  [CAPC0603X33N]  104.39,10.79 90 bottom
C56  02013C682KAT2A  [CAPC0603X33N]  95.12,10.79 90 bottom
C57  02013C682KAT2A  [CAPC0603X33N]  77.6,11.05 90 bottom
C58  02013C682KAT2A  [CAPC0603X33N]  68.33,10.92 90 bottom
C59  02013C682KAT2A  [CAPC0603X33N]  50.93,10.67 90 bottom
C60  02013C682KAT2A  [CAPC0603X33N]  41.4,10.67 90 bottom
C61  02013C682KAT2A  [CAPC0603X33N]  23.75,10.03 90 bottom
C62  02013C682KAT2A  [CAPC0603X33N]  14.48,10.03 90 bottom
C63  02013C682KAT2A  [CAPC0603X33N]  251.71,33.53 90 bottom
C64  02013C682KAT2A  [CAPC0603X33N]  242.32,33.27 90 bottom
C65  02013C682KAT2A  [CAPC0603X33N]  224.92,33.27 90 bottom
C66  02013C682KAT2A  [CAPC0603X33N]  215.65,33.27 90 bottom
C67  02013C682KAT2A  [CAPC0603X33N]  197.87,33.53 90 bottom
C68  02013C682KAT2A  [CAPC0603X33N]  188.47,33.4 90 bottom
C69  02013C682KAT2A  [CAPC0603X33N]  90.81,32.89 90 bottom
C70  02013C682KAT2A  [CAPC0603X33N]  81.41,32.89 90 bottom
C71  02013C682KAT2A  [CAPC0603X33N]  64.01,33.02 90 bottom
C72  02013C682KAT2A  [CAPC0603X33N]  54.86,33.02 90 bottom
C73  02013C682KAT2A  [CAPC0603X33N]  37.34,33.27 90 bottom
C74  02013C682KAT2A  [CAPC0603X33N]  27.94,33.27 90 bottom
C75  02013C682KAT2A  [CAPC0603X33N]  264.92,11.18 90 bottom
C76  02013C682KAT2A  [CAPC0603X33N]  255.52,11.05 90 bottom
C77  02013C682KAT2A  [CAPC0603X33N]  238.25,11.05 90 bottom
C78  02013C682KAT2A  [CAPC0603X33N]  228.73,11.05 90 bottom
C79  02013C682KAT2A  [CAPC0603X33N]  172.85,68.96 180 bottom
C80  02013C682KAT2A  [CAPC0603X33N]  163.32,68.96 180 bottom
C81  02013C682KAT2A  [CAPC0603X33N]  145.8,68.83 180 bottom
C82  02013C682KAT2A  [CAPC0603X33N]  136.53,68.83 180 bottom
C83  02013C682KAT2A  [CAPC0603X33N]  118.62,68.83 180 bottom
C84  02013C682KAT2A  [CAPC0603X33N]  109.47,68.83 180 bottom
C85  02013C682KAT2A  [CAPC0603X33N]  92.2,68.83 180 bottom
C86  02013C682KAT2A  [CAPC0603X33N]  82.55,68.83 180 bottom
C87  02013C682KAT2A  [CAPC0603X33N]  65.53,68.83 180 bottom
C88  02013C682KAT2A  [CAPC0603X33N]  56.01,68.83 180 bottom
C89  02013C682KAT2A  [CAPC0603X33N]  172.85,21.72 180 bottom
C90  02013C682KAT2A  [CAPC0603X33N]  163.58,21.72 180 bottom
C91  02013C682KAT2A  [CAPC0603X33N]  147.32,21.72 180 bottom
C92  02013C682KAT2A  [CAPC0603X33N]  135.38,21.72 180 bottom
C93  02013C682KAT2A  [CAPC0603X33N]  119.51,21.72 180 bottom
C94  02013C682KAT2A  [CAPC0603X33N]  109.98,21.72 180 bottom
C95  06033C105KAT4A  [CAPC1608X90N]  120.78,176.66 205.9 bottom
C96  02013C682KAT2A  [CAPC0603X33N]  210.57,89.53 0 bottom
C97  C3225X7R1N106K250AC  [CAPC3225X230N]  123.06,179.45 205.9 bottom
C98  02013C682KAT2A  [CAPC0603X33N]  204.47,89.66 0 bottom
C99  C3225X7R1N106K250AC  [CAPC3225X230N]  104.52,149.61 0 bottom
C100  02013C682KAT2A  [CAPC0603X33N]  198.5,89.66 0 bottom
C101  C3225X7R1N106K250AC  [CAPC3225X230N]  105.28,157.73 0 bottom
C102  02013C682KAT2A  [CAPC0603X33N]  75.95,89.66 0 bottom
C103  02013C682KAT2A  [CAPC0603X33N]  194.56,67.69 180 bottom
C104  02013C682KAT2A  [CAPC0603X33N]  70.36,89.79 0 bottom
C105  02013C682KAT2A  [CAPC0603X33N]  200.53,67.94 180 bottom
C106  02013C682KAT2A  [CAPC0603X33N]  64.77,89.79 0 bottom
C107  C3225X7R1N106K250AC  [CAPC3225X230N]  133.73,196.85 180 top
C108  02013C682KAT2A  [CAPC0603X33N]  223.65,68.07 180 bottom
C109  02013C682KAT2A  [CAPC0603X33N]  237.49,67.94 180 bottom
C110  02013C682KAT2A  [CAPC0603X33N]  230.76,67.94 180 bottom
C111  02013C682KAT2A  [CAPC0603X33N]  206.63,67.94 180 bottom
C112  02013C682KAT2A  [CAPC0603X33N]  183.64,67.69 180 bottom
C113  C3225X7R1N106K250AC  [CAPC3225X230N]  133.73,208.28 180 top
C114  C3225X7R1N106K250AC  [CAPC3225X230N]  99.57,146.81 270 top
D3.3V_1  RCS04020000Z0ED  [RESC1005X40N]  143.76,198.5 0 bottom
DIGITAL_1  RCS04020000Z0ED  [RESC1005X40N]  91.57,44.2 90 bottom
DIGITAL_2  RCS04020000Z0ED  [RESC1005X40N]  89.41,44.2 90 bottom
DIGITAL_3  RCS04020000Z0ED  [RESC1005X40N]  87.25,44.2 90 bottom
DIGITAL_4  RCS04020000Z0ED  [RESC1005X40N]  85.09,44.2 90 bottom
DIGITAL_5  RCS04020000Z0ED  [RESC1005X40N]  171.2,45.47 90 bottom
DIGITAL_6  RCS04020000Z0ED  [RESC1005X40N]  168.53,45.47 90 bottom
DIGITAL_7  RCS04020000Z0ED  [RESC1005X40N]  143.51,45.34 90 bottom
DIGITAL_8  RCS04020000Z0ED  [RESC1005X40N]  140.34,45.34 90 bottom
DIGITAL_SYSTEMS_3V  NCP187AMT330TAG  [SON65P200X200X80-7N]  104.65,153.16 180 bottom
G3.3V_2  RCS04020000Z0ED  [RESC1005X40N]  143.76,194.31 0 bottom
G5V_1  RCS04020000Z0ED  [RESC1005X40N]  143.76,199.9 0 bottom
G5V_2  RCS04020000Z0ED  [RESC1005X40N]  143.76,192.91 0 bottom
GEN_BUSY_1  RCS04020000Z0ED  [RESC1005X40N]  99.57,141.1 270 bottom
GEN_BUSY_2  RCS04020000Z0ED  [RESC1005X40N]  106.17,114.94 270 bottom
GENERAL_PURPOSE_1  ADS8588HIPM  [QFP50P1200X1200X160-64N]  96.77,131.57 270 bottom
GENERAL_PURPOSE_2  ADS8588HIPM  [QFP50P1200X1200X160-64N]  103.38,105.41 270 bottom
GENERAL_PURPOSE_3.3V  NCP187AMT330TAG  [SON65P200X200X80-7N]  104.65,161.42 180 bottom
GENERAL_PURPOSE_5V  LM1085IS-5.0_NOPB  [TO254P1435X464-4N]  104.78,171.96 25.9 bottom
GENERAL_PURPOSE_5V_3.3V_SUPPLY_RAIL  LM1085IS-5.0_NOPB  [TO254P1435X464-4N]  111.63,185.29 25.9 bottom
GND  RCS04020000Z0ED  [RESC1005X40N]  143.76,197.1 0 bottom
GND_2  RCS04020000Z0ED  [RESC1005X40N]  143.76,195.71 0 bottom
IC1  LTV-845S  [SOP254P1016X460-16N]  127.25,173.23 90 top
IC2  SN74CBTLV3251DBQR  [SOP64P600X175-16N]  150.37,89.15 180 bottom
IC3  TMUX1104DGSR  [SOP50P490X110-10N]  219.71,47.37 180 bottom
IC4  SN74LVC32ADBR  [SOP65P780X200-14N]  133.86,202.44 0 top
IC5  NCS21911SN2T1G  [SOT95P275X110-5N]  214.63,71.75 180 bottom
IC6  NCS21911SN2T1G  [SOT95P275X110-5N]  187.32,71.25 180 bottom
IC7  NCS21911SN2T1G  [SOT95P275X110-5N]  192.91,71.25 180 bottom
IC8  LTV-845S  [SOP254P1016X460-16N]  73.15,42.16 90 bottom
IC9  LTV-845S  [SOP254P1016X460-16N]  156.21,43.69 90 bottom
IC10  NCS21911SN2T1G  [SOT95P275X110-5N]  199.14,71.37 180 bottom
IC11  NCS21911SN2T1G  [SOT95P275X110-5N]  205.1,71.37 180 bottom
IC12  NCS21911SN2T1G  [SOT95P275X110-5N]  214.63,63.88 0 bottom
IC13  NCS21911SN2T1G  [SOT95P275X110-5N]  187.07,64.14 180 bottom
IC14  NCS21911SN2T1G  [SOT95P275X110-5N]  192.79,64.14 180 bottom
IC15  NCS21911SN2T1G  [SOT95P275X110-5N]  199.14,64.26 180 bottom
IC16  NCS21911SN2T1G  [SOT95P275X110-5N]  205.1,64.26 180 bottom
IC17  NCS21911SN2T1G  [SOT95P275X110-5N]  182.12,71.37 180 bottom
IC18  NCS21911SN2T1G  [SOT95P275X110-5N]  181.86,64.14 180 bottom
IC19  NCS21911SN2T1G  [SOT95P275X110-5N]  14.48,2.79 0 bottom
IC20  NCS21911SN2T1G  [SOT95P275X110-5N]  23.88,2.79 180 bottom
IC21  NCS21911SN2T1G  [SOT95P275X110-5N]  41.53,2.79 0 bottom
IC22  NCS21911SN2T1G  [SOT95P275X110-5N]  50.93,2.79 180 bottom
IC23  NCS21911SN2T1G  [SOT95P275X110-5N]  68.33,2.79 0 bottom
IC24  NCS21911SN2T1G  [SOT95P275X110-5N]  77.72,2.79 180 bottom
IC25  NCS21911SN2T1G  [SOT95P275X110-5N]  95.12,2.79 0 bottom
IC26  NCS21911SN2T1G  [SOT95P275X110-5N]  104.52,2.79 180 bottom
IC27  NCS21911SN2T1G  [SOT95P275X110-5N]  121.79,2.79 0 bottom
IC28  NCS21911SN2T1G  [SOT95P275X110-5N]  131.19,2.79 180 bottom
IC29  NCS21911SN2T1G  [SOT95P275X110-5N]  148.84,2.79 0 bottom
IC30  NCS21911SN2T1G  [SOT95P275X110-5N]  158.24,2.79 180 bottom
IC31  NCS21911SN2T1G  [SOT95P275X110-5N]  175.64,2.79 0 bottom
IC32  NCS21911SN2T1G  [SOT95P275X110-5N]  185.04,2.79 180 bottom
IC33  NCS21911SN2T1G  [SOT95P275X110-5N]  202.18,2.79 0 bottom
IC34  NCS21911SN2T1G  [SOT95P275X110-5N]  211.58,2.79 180 bottom
IC35  SN74LVC32ADBR  [SOP65P780X200-14N]  105.03,153.03 180 top
IC36  SN74LVC32ADBR  [SOP65P780X200-14N]  133.86,191.39 0 top
IC51  NCS21911SN2T1G  [SOT95P275X110-5N]  228.85,2.79 0 bottom
IC52  NCS21911SN2T1G  [SOT95P275X110-5N]  238.25,2.79 180 bottom
IC53  NCS21911SN2T1G  [SOT95P275X110-5N]  255.52,2.79 0 bottom
IC54  NCS21911SN2T1G  [SOT95P275X110-5N]  264.92,2.79 180 bottom
IC55  NCS21911SN2T1G  [SOT95P275X110-5N]  27.94,25.4 0 bottom
IC56  NCS21911SN2T1G  [SOT95P275X110-5N]  37.34,25.4 180 bottom
IC57  NCS21911SN2T1G  [SOT95P275X110-5N]  54.74,25.4 0 bottom
IC58  NCS21911SN2T1G  [SOT95P275X110-5N]  64.14,25.4 180 bottom
IC59  NCS21911SN2T1G  [SOT95P275X110-5N]  81.41,25.4 0 bottom
IC60  NCS21911SN2T1G  [SOT95P275X110-5N]  90.81,25.4 180 bottom
IC61  NCS21911SN2T1G  [SOT95P275X110-5N]  188.47,25.4 0 bottom
IC62  NCS21911SN2T1G  [SOT95P275X110-5N]  197.87,25.4 180 bottom
IC63  NCS21911SN2T1G  [SOT95P275X110-5N]  215.65,25.4 0 bottom
IC64  NCS21911SN2T1G  [SOT95P275X110-5N]  225.04,25.4 180 bottom
IC65  NCS21911SN2T1G  [SOT95P275X110-5N]  242.44,25.4 0 bottom
IC66  NCS21911SN2T1G  [SOT95P275X110-5N]  251.84,25.4 180 bottom
IC67  NCS21911SN2T1G  [SOT95P275X110-5N]  108.2,18.16 0 bottom
IC68  NCS21911SN2T1G  [SOT95P275X110-5N]  117.6,18.16 180 bottom
IC69  NCS21911SN2T1G  [SOT95P275X110-5N]  131.83,18.29 0 bottom
IC70  NCS21911SN2T1G  [SOT95P275X110-5N]  147.7,18.29 180 bottom
IC71  NCS21911SN2T1G  [SOT95P275X110-5N]  161.93,18.16 0 bottom
IC72  NCS21911SN2T1G  [SOT95P275X110-5N]  171.32,18.16 180 bottom
IC73  NCS21911SN2T1G  [SOT95P275X110-5N]  54.36,64.9 0 bottom
IC74  NCS21911SN2T1G  [SOT95P275X110-5N]  63.75,64.9 180 bottom
IC75  NCS21911SN2T1G  [SOT95P275X110-5N]  80.9,64.77 0 bottom
IC76  NCS21911SN2T1G  [SOT95P275X110-5N]  90.3,64.77 180 bottom
IC77  NCS21911SN2T1G  [SOT95P275X110-5N]  107.7,64.77 0 bottom
IC78  NCS21911SN2T1G  [SOT95P275X110-5N]  117.09,64.77 180 bottom
IC79  NCS21911SN2T1G  [SOT95P275X110-5N]  134.87,64.77 0 bottom
IC80  NCS21911SN2T1G  [SOT95P275X110-5N]  144.27,64.77 180 bottom
IC81  NCS21911SN2T1G  [SOT95P275X110-5N]  161.67,64.77 0 bottom
IC82  NCS21911SN2T1G  [SOT95P275X110-5N]  171.07,64.77 180 bottom
IC83  NCS21911SN2T1G  [SOT95P275X110-5N]  108.46,25.4 0 bottom
IC84  NCS21911SN2T1G  [SOT95P275X110-5N]  117.86,25.4 180 bottom
IC85  NCS21911SN2T1G  [SOT95P275X110-5N]  135.38,25.4 0 bottom
IC86  NCS21911SN2T1G  [SOT95P275X110-5N]  144.78,25.4 180 bottom
IC87  NCS21911SN2T1G  [SOT95P275X110-5N]  161.8,25.4 0 bottom
IC88  NCS21911SN2T1G  [SOT95P275X110-5N]  171.2,25.4 180 bottom
IC89  NCS21911SN2T1G  [SOT95P275X110-5N]  54.36,72.39 0 bottom
IC90  NCS21911SN2T1G  [SOT95P275X110-5N]  63.75,72.39 180 bottom
IC91  NCS21911SN2T1G  [SOT95P275X110-5N]  81.03,72.39 0 bottom
IC92  NCS21911SN2T1G  [SOT95P275X110-5N]  90.42,72.39 180 bottom
IC93  NCS21911SN2T1G  [SOT95P275X110-5N]  108.08,72.39 0 bottom
IC94  NCS21911SN2T1G  [SOT95P275X110-5N]  117.47,72.39 180 bottom
IC95  NCS21911SN2T1G  [SOT95P275X110-5N]  135,72.39 0 bottom
IC96  NCS21911SN2T1G  [SOT95P275X110-5N]  144.4,72.39 180 bottom
IC97  NCS21911SN2T1G  [SOT95P275X110-5N]  161.8,72.39 0 bottom
IC98  NCS21911SN2T1G  [SOT95P275X110-5N]  171.2,72.39 180 bottom
IC99  NCS21911SN2T1G  [SOT95P275X110-5N]  228.98,63.75 0 bottom
IC100  NCS21911SN2T1G  [SOT95P275X110-5N]  235.59,63.75 180 bottom
IC101  NCS21911SN2T1G  [SOT95P275X110-5N]  222.25,63.88 0 bottom
IC103  NCS21911SN2T1G  [SOT95P275X110-5N]  66.17,85.47 270 bottom
IC105  NCS21911SN2T1G  [SOT95P275X110-5N]  72.26,85.34 270 bottom
IC107  NCS21911SN2T1G  [SOT95P275X110-5N]  78.61,85.47 270 bottom
IC109  NCS21911SN2T1G  [SOT95P275X110-5N]  199.26,85.22 270 bottom
IC111  NCS21911SN2T1G  [SOT95P275X110-5N]  205.61,85.22 270 bottom
IC113  NCS21911SN2T1G  [SOT95P275X110-5N]  211.84,85.22 270 bottom
IC115  NCS21911SN2T1G  [SOT95P275X110-5N]  228.98,71.63 180 bottom
IC116  NCS21911SN2T1G  [SOT95P275X110-5N]  235.71,71.37 180 bottom
IC117  NCS21911SN2T1G  [SOT95P275X110-5N]  222.25,71.75 180 bottom
IC119  NCS21911SN2T1G  [SOT95P275X110-5N]  67.18,93.98 270 bottom
IC121  NCS21911SN2T1G  [SOT95P275X110-5N]  72.26,93.98 270 bottom
IC123  NCS21911SN2T1G  [SOT95P275X110-5N]  77.34,93.98 270 bottom
IC125  NCS21911SN2T1G  [SOT95P275X110-5N]  201.68,93.98 270 bottom
IC127  NCS21911SN2T1G  [SOT95P275X110-5N]  206.76,93.98 270 bottom
IC129  NCS21911SN2T1G  [SOT95P275X110-5N]  211.84,93.98 270 bottom
J37  46207-0008  [462070008]  178.56,173.1 118.6 top
J38  43045-2422  [430452422]  148.84,216.79 118.6 top
J39  3-794636-2  [37946362]  199.52,118.24 28.6 top
JP1  [1X24]  117.73,126.75 270 top
JP2  [1X24]  133.22,126.75 270 top
JP3  [1X24]  145.54,126.91 270 top
JP4  [1X24]  161.03,126.91 270 top
LED1  THG1111C-0005-TR  [LEDC1608X80N]  96.39,161.8 151.4 top
LED2  THG1111C-0005-TR  [LEDC1608X80N]  93.09,155.83 151.4 top
LED3  THG1111C-0005-TR  [LEDC1608X80N]  106.43,179.96 151.4 top
LED4  THG1111C-0005-TR  [LEDC1608X80N]  109.6,185.8 151.4 top
LED5  THG1111C-0005-TR  [LEDC1608X80N]  103,173.99 151.4 top
LED6  THG1111C-0005-TR  [LEDC1608X80N]  99.82,167.64 151.4 top
LED7  THG1111C-0005-TR  [LEDC1608X80N]  112.9,192.02 151.4 top
LED8  THG1111C-0005-TR  [LEDC1608X80N]  116.46,198.5 151.4 top
LED9  THG1111C-0005-TR  [LEDC1608X80N]  119.76,204.47 151.4 top
LED10  THG1111C-0005-TR  [LEDC1608X80N]  123.06,210.57 151.4 top
LED11  THG1111C-0005-TR  [LEDC1608X80N]  126.36,216.92 151.4 top
LED12  THG1111C-0005-TR  [LEDC1608X80N]  129.67,223.52 151.4 top
MICROCONTROLLER_5V  LM1085IS-5.0_NOPB  [TO254P1435X464-4N]  126.62,213.49 25.9 bottom
NC1  5/64IN  [5/64IN]  139.7,226.06 90 top
NC2  5/64IN  [5/64IN]  91.57,149.86 90 top
NC3  5/64IN  [5/64IN]  187.83,149.86 90 top
NC4  5/64IN  [5/64IN]  219.84,89.03 90 top
NC5  5/64IN  [5/64IN]  59.56,89.03 90 top
NC6  5/64IN  [5/64IN]  34.8,42.04 90 top
NC7  5/64IN  [5/64IN]  244.6,42.04 90 top
NC8  5/64IN  [5/64IN]  139.7,18.92 90 top
NC9  5/64IN  [5/64IN]  50.8,18.92 90 top
NC10  5/64IN  [5/64IN]  228.6,18.92 90 top
NC11  5/64IN  [5/64IN]  114.3,89.03 90 top
NC12  5/64IN  [5/64IN]  165.1,89.03 90 top
R1  CRCW0402100KFKEDC  [RESC1005X35N]  79.5,45.85 270 top
R2  CRCW0402100KFKEDC  [RESC1005X35N]  74.42,45.85 270 top
R3  CRCW0402100KFKEDC  [RESC1005X35N]  69.34,45.97 270 top
R4  CRCW0402100KFKEDC  [RESC1005X35N]  64.26,45.85 270 top
R5  CRCW0402100KFKEDC  [RESC1005X35N]  162.56,47.62 270 top
R6  CRCW0402100KFKEDC  [RESC1005X35N]  157.48,47.62 270 top
R7  CRCW0402100KFKEDC  [RESC1005X35N]  152.4,47.5 270 top
R8  CRCW0402100KFKEDC  [RESC1005X35N]  147.32,47.5 270 top
R9  CRCW0402100RFKEDC  [RESC1005X35N]  48.77,51.05 180 bottom
R10  CRCW0402100RFKEDC  [RESC1005X35N]  76.45,52.07 180 bottom
R11  CRCW0402100RFKEDC  [RESC1005X35N]  96.65,50.67 0 bottom
R12  CRCW0402100RFKEDC  [RESC1005X35N]  121.92,52.2 0 bottom
R13  CRCW0402100RFKEDC  [RESC1005X35N]  148.84,53.34 0 bottom
R14  CRCW0402100RFKEDC  [RESC1005X35N]  178.05,49.28 0 bottom
R15  CRCW0402100RFKEDC  [RESC1005X35N]  204.6,49.02 0 bottom
R16  CRCW0402100RFKEDC  [RESC1005X35N]  233.43,50.04 0 bottom
R17  CRCW0402100KFKEDC  [RESC1005X35N]  48.77,48.77 180 bottom
R18  CRCW0402100KFKEDC  [RESC1005X35N]  76.45,50.16 180 bottom
R19  CRCW0402100KFKEDC  [RESC1005X35N]  96.65,48.26 0 bottom
R20  CRCW0402100KFKEDC  [RESC1005X35N]  121.92,49.53 0 bottom
R21  CRCW0402100KFKEDC  [RESC1005X35N]  148.84,50.93 0 bottom
R22  CRCW0402100KFKEDC  [RESC1005X35N]  178.05,46.86 0 bottom
R23  CRCW0402100KFKEDC  [RESC1005X35N]  204.47,46.74 0 bottom
R24  CRCW0402100KFKEDC  [RESC1005X35N]  233.43,48.13 0 bottom
R25  CRCW0402100KFKEDC  [RESC1005X35N]  14.48,6.86 90 bottom
R26  CRCW0402100KFKEDC  [RESC1005X35N]  23.75,6.86 90 bottom
R27  CRCW0402100KFKEDC  [RESC1005X35N]  41.4,7.37 90 bottom
R28  CRCW0402100KFKEDC  [RESC1005X35N]  50.93,7.37 90 bottom
R29  CRCW0402100KFKEDC  [RESC1005X35N]  68.33,7.49 90 bottom
R30  CRCW0402100KFKEDC  [RESC1005X35N]  77.6,7.62 90 bottom
R31  CRCW0402100KFKEDC  [RESC1005X35N]  95.12,7.24 90 bottom
R32  CRCW0402100KFKEDC  [RESC1005X35N]  104.39,7.24 90 bottom
R33  CRCW0402100KFKEDC  [RESC1005X35N]  121.79,7.24 90 bottom
R34  CRCW0402100KFKEDC  [RESC1005X35N]  131.19,7.37 90 bottom
R35  CRCW0402100KFKEDC  [RESC1005X35N]  148.84,7.11 90 bottom
R36  CRCW0402100KFKEDC  [RESC1005X35N]  157.99,7.24 90 bottom
R37  CRCW0402100KFKEDC  [RESC1005X35N]  175.51,6.99 90 bottom
R38  CRCW0402100KFKEDC  [RESC1005X35N]  185.04,7.24 90 bottom
R39  CRCW0402100KFKEDC  [RESC1005X35N]  202.18,7.11 90 bottom
R40  CRCW0402100KFKEDC  [RESC1005X35N]  211.58,7.11 90 bottom
R41  CRCW0402100KFKEDC  [RESC1005X35N]  251.71,29.59 90 bottom
R42  CRCW0402100KFKEDC  [RESC1005X35N]  242.32,29.34 90 bottom
R43  CRCW0402100KFKEDC  [RESC1005X35N]  224.92,29.46 90 bottom
R44  CRCW0402100KFKEDC  [RESC1005X35N]  215.65,29.46 90 bottom
R45  CRCW0402100KFKEDC  [RESC1005X35N]  197.87,29.84 90 bottom
R46  CRCW0402100KFKEDC  [RESC1005X35N]  188.47,29.84 90 bottom
R47  CRCW0402100KFKEDC  [RESC1005X35N]  90.81,29.59 90 bottom
R48  CRCW0402100KFKEDC  [RESC1005X35N]  81.41,29.59 90 bottom
R49  CRCW0402100KFKEDC  [RESC1005X35N]  64.01,29.46 90 bottom
R50  CRCW0402100KFKEDC  [RESC1005X35N]  54.86,29.46 90 bottom
R51  CRCW0402100KFKEDC  [RESC1005X35N]  37.34,29.46 90 bottom
R52  CRCW0402100KFKEDC  [RESC1005X35N]  27.94,29.46 90 bottom
R53  CRCW0402100KFKEDC  [RESC1005X35N]  264.92,7.24 90 bottom
R54  CRCW0402100KFKEDC  [RESC1005X35N]  255.52,7.11 90 bottom
R55  CRCW0402100KFKEDC  [RESC1005X35N]  238.25,7.37 90 bottom
R56  CRCW0402100KFKEDC  [RESC1005X35N]  228.73,7.37 90 bottom
R57  CRCW0402100KFKEDC  [RESC1005X35N]  170.05,68.96 180 bottom
R58  CRCW0402100KFKEDC  [RESC1005X35N]  160.53,68.96 180 bottom
R59  CRCW0402100KFKEDC  [RESC1005X35N]  143,68.83 180 bottom
R60  CRCW0402100KFKEDC  [RESC1005X35N]  133.73,68.83 180 bottom
R61  CRCW0402100KFKEDC  [RESC1005X35N]  115.82,68.83 180 bottom
R62  CRCW0402100KFKEDC  [RESC1005X35N]  106.68,68.83 180 bottom
R63  CRCW0402100KFKEDC  [RESC1005X35N]  89.41,68.83 180 bottom
R64  CRCW0402100KFKEDC  [RESC1005X35N]  79.76,68.83 180 bottom
R65  CRCW0402100KFKEDC  [RESC1005X35N]  62.74,68.83 180 bottom
R66  CRCW0402100KFKEDC  [RESC1005X35N]  53.21,68.83 180 bottom
R67  CRCW0402100KFKEDC  [RESC1005X35N]  170.05,21.72 180 bottom
R68  CRCW0402100KFKEDC  [RESC1005X35N]  160.78,21.72 180 bottom
R69  CRCW0402100KFKEDC  [RESC1005X35N]  144.53,21.72 180 bottom
R70  CRCW0402100KFKEDC  [RESC1005X35N]  132.59,21.72 180 bottom
R71  CRCW0402100KFKEDC  [RESC1005X35N]  116.71,21.72 180 bottom
R72  CRCW0402100KFKEDC  [RESC1005X35N]  107.19,21.72 180 bottom
R73  CRCW0402100KFKEDC  [RESC1005X35N]  120.65,182.12 90 top
R74  CRCW0402100KFKEDC  [RESC1005X35N]  213.36,89.53 0 bottom
R75  CRCW0402100KFKEDC  [RESC1005X35N]  125.73,182.12 90 top
R76  CRCW0402100KFKEDC  [RESC1005X35N]  207.26,89.66 0 bottom
R77  CRCW0402100KFKEDC  [RESC1005X35N]  130.81,181.99 90 top
R78  CRCW0402100KFKEDC  [RESC1005X35N]  201.29,89.66 0 bottom
R79  CRCW0402100KFKEDC  [RESC1005X35N]  135.89,182.12 90 top
R80  CRCW0402100KFKEDC  [RESC1005X35N]  78.74,89.66 0 bottom
R81  CRCW0402100RFKEDC  [RESC1005X35N]  118.49,163.83 90 top
R82  CRCW0402100KFKEDC  [RESC1005X35N]  73.15,89.79 0 bottom
R83  CRCW0402100RFKEDC  [RESC1005X35N]  123.57,163.83 90 top
R84  CRCW0402100KFKEDC  [RESC1005X35N]  67.56,89.79 0 bottom
R86  CRCW0402100KFKEDC  [RESC1005X35N]  220.85,68.07 180 bottom
R87  CRCW0402100KFKEDC  [RESC1005X35N]  234.7,67.94 180 bottom
R88  CRCW0402100KFKEDC  [RESC1005X35N]  227.97,67.94 180 bottom
R89  CRCW0402100RFKEDC  [RESC1005X35N]  123.44,202.56 151.4 top
R90  CRCW0402100RFKEDC  [RESC1005X35N]  126.75,208.53 151.4 top
R91  CRCW0402100RFKEDC  [RESC1005X35N]  130.05,214.88 151.4 top
R92  CRCW0402100RFKEDC  [RESC1005X35N]  133.35,221.49 151.4 top
R93  CRCW0402100RFKEDC  [RESC1005X35N]  120.14,196.6 151.4 top
R94  CRCW0402100RFKEDC  [RESC1005X35N]  116.59,189.99 151.4 top
R95  CRCW0402100RFKEDC  [RESC1005X35N]  113.28,183.77 151.4 top
R96  CRCW0402100RFKEDC  [RESC1005X35N]  109.98,178.05 151.4 top
R97  CRCW0402100RFKEDC  [RESC1005X35N]  106.55,171.96 151.4 top
R98  CRCW0402100RFKEDC  [RESC1005X35N]  128.65,163.7 90 top
R99  CRCW0402100RFKEDC  [RESC1005X35N]  103.38,165.74 151.4 top
R100  CRCW0402100RFKEDC  [RESC1005X35N]  99.95,159.89 151.4 top
R101  CRCW0402100RFKEDC  [RESC1005X35N]  96.65,153.92 151.4 top
R102  CRCW0402100RFKEDC  [RESC1005X35N]  133.73,163.7 90 top
R103  CRCW0402100KFKEDC  [RESC1005X35N]  136.14,164.21 0 top
R104  CRCW0402100KFKEDC  [RESC1005X35N]  120.9,164.34 0 top
R105  CRCW0402100KFKEDC  [RESC1005X35N]  125.98,164.34 0 top
R106  CRCW0402100KFKEDC  [RESC1005X35N]  131.32,164.34 0 top
R107  CRCW0402100KFKEDC  [RESC1005X35N]  213.87,68.07 180 bottom
R108  CRCW0402100KFKEDC  [RESC1005X35N]  186.31,67.69 180 bottom
R109  CRCW0402100KFKEDC  [RESC1005X35N]  192.02,67.69 180 bottom
R110  CRCW0402100KFKEDC  [RESC1005X35N]  198.12,67.94 180 bottom
R111  CRCW0402100KFKEDC  [RESC1005X35N]  203.84,67.94 180 bottom
R112  CRCW0402100KFKEDC  [RESC1005X35N]  180.85,67.69 180 bottom
R113  ERJ-2RKF1403X  [RESC1005X40N]  214.5,60.2 180 bottom
R114  ERJ-2RKF1403X  [RESC1005X40N]  186.69,60.33 180 bottom
R115  ERJ-2RKF1403X  [RESC1005X40N]  193.17,60.33 0 bottom
R116  ERJ-2RKF1403X  [RESC1005X40N]  199.9,60.33 180 bottom
R117  ERJ-2RKF1403X  [RESC1005X40N]  206.63,60.33 180 bottom
R118  ERJ-2RKF1403X  [RESC1005X40N]  179.96,60.33 0 bottom
R119  CRCW0402100KFKEDC  [RESC1005X35N]  214.5,58.17 0 bottom
R120  CRCW0402100KFKEDC  [RESC1005X35N]  186.69,58.29 0 bottom
R121  CRCW0402100KFKEDC  [RESC1005X35N]  193.17,58.42 180 bottom
R122  CRCW0402100KFKEDC  [RESC1005X35N]  199.9,58.17 0 bottom
R123  CRCW0402100KFKEDC  [RESC1005X35N]  206.5,58.17 0 bottom
R124  CRCW0402100KFKEDC  [RESC1005X35N]  179.83,58.29 180 bottom
R125  RCS04020000Z0ED  [RESC1005X40N]  189.99,42.55 270 bottom
R126  RCS04020000Z0ED  [RESC1005X40N]  194.31,42.55 90 bottom
R127  RCS04020000Z0ED  [RESC1005X40N]  221.87,43.56 90 bottom
R128  RCS04020000Z0ED  [RESC1005X40N]  217.17,43.56 270 bottom
R145  CRCW0402100KFKEDC  [RESC1005X35N]  108.71,161.54 270 bottom
R146  CRCW0402100KFKEDC  [RESC1005X35N]  107.95,153.67 270 bottom
R147  RCS04020000Z0ED  [RESC1005X40N]  167.89,96.01 0 bottom
R148  RCS04020000Z0ED  [RESC1005X40N]  167.89,97.28 0 bottom
R149  RCS04020000Z0ED  [RESC1005X40N]  167.89,98.55 0 bottom
R150  RCS04020000Z0ED  [RESC1005X40N]  167.89,99.82 0 bottom
R151  RCS04020000Z0ED  [RESC1005X40N]  167.89,101.09 0 bottom
R152  RCS04020000Z0ED  [RESC1005X40N]  167.89,102.36 0 bottom
R153  RCS04020000Z0ED  [RESC1005X40N]  167.89,103.63 0 bottom
R154  RCS04020000Z0ED  [RESC1005X40N]  167.89,104.9 0 bottom
R155  RCS04020000Z0ED  [RESC1005X40N]  167.89,106.17 0 bottom
R156  RCS04020000Z0ED  [RESC1005X40N]  167.89,107.44 0 bottom
R157  RCS04020000Z0ED  [RESC1005X40N]  167.89,108.71 0 bottom
R158  RCS04020000Z0ED  [RESC1005X40N]  168.4,139.57 0 bottom
R159  RCS04020000Z0ED  [RESC1005X40N]  168.4,138.3 0 bottom
R160  RCS04020000Z0ED  [RESC1005X40N]  168.4,137.03 0 bottom
R161  RCS04020000Z0ED  [RESC1005X40N]  168.4,135.76 0 bottom
R162  RCS04020000Z0ED  [RESC1005X40N]  168.4,134.49 0 bottom
R163  RCS04020000Z0ED  [RESC1005X40N]  168.4,133.22 0 bottom
R164  ERJ-2RKF1403X  [RESC1005X40N]  109.22,14.48 0 bottom
R165  ERJ-2RKF1403X  [RESC1005X40N]  116.08,14.48 0 bottom
R166  ERJ-2RKF1403X  [RESC1005X40N]  133.48,14.86 0 bottom
R167  ERJ-2RKF1403X  [RESC1005X40N]  145.8,14.48 0 bottom
R168  ERJ-2RKF1403X  [RESC1005X40N]  162.81,14.48 0 bottom
R169  ERJ-2RKF1403X  [RESC1005X40N]  170.05,14.48 0 bottom
R170  ERJ-2RKF1403X  [RESC1005X40N]  55.12,60.71 0 bottom
R171  ERJ-2RKF1403X  [RESC1005X40N]  62.99,60.71 0 bottom
R172  ERJ-2RKF1403X  [RESC1005X40N]  81.79,60.83 0 bottom
R173  ERJ-2RKF1403X  [RESC1005X40N]  89.28,60.83 0 bottom
R174  ERJ-2RKF1403X  [RESC1005X40N]  108.58,60.71 0 bottom
R175  ERJ-2RKF1403X  [RESC1005X40N]  116.08,60.71 0 bottom
R176  ERJ-2RKF1403X  [RESC1005X40N]  135.64,60.83 0 bottom
R177  ERJ-2RKF1403X  [RESC1005X40N]  143.38,60.83 0 bottom
R178  ERJ-2RKF1403X  [RESC1005X40N]  162.81,60.83 0 bottom
R179  ERJ-2RKF1403X  [RESC1005X40N]  169.93,60.83 0 bottom
R180  CRCW0402100KFKEDC  [RESC1005X35N]  109.22,12.45 0 bottom
R181  CRCW0402100KFKEDC  [RESC1005X35N]  115.95,12.45 180 bottom
R182  CRCW0402100KFKEDC  [RESC1005X35N]  133.48,12.57 0 bottom
R183  CRCW0402100KFKEDC  [RESC1005X35N]  145.67,12.32 180 bottom
R184  CRCW0402100KFKEDC  [RESC1005X35N]  162.81,12.7 0 bottom
R185  CRCW0402100KFKEDC  [RESC1005X35N]  170.05,12.7 180 bottom
R186  CRCW0402100KFKEDC  [RESC1005X35N]  54.99,58.67 0 bottom
R187  CRCW0402100KFKEDC  [RESC1005X35N]  62.99,58.67 180 bottom
R188  CRCW0402100KFKEDC  [RESC1005X35N]  81.79,58.8 0 bottom
R189  CRCW0402100KFKEDC  [RESC1005X35N]  89.28,58.8 180 bottom
R190  CRCW0402100KFKEDC  [RESC1005X35N]  108.58,58.55 0 bottom
R191  CRCW0402100KFKEDC  [RESC1005X35N]  115.95,58.67 180 bottom
R192  CRCW0402100KFKEDC  [RESC1005X35N]  135.64,58.55 0 bottom
R193  CRCW0402100KFKEDC  [RESC1005X35N]  143.38,58.55 180 bottom
R194  CRCW0402100KFKEDC  [RESC1005X35N]  162.81,58.29 180 bottom
R195  CRCW0402100KFKEDC  [RESC1005X35N]  169.93,58.55 180 bottom
R196  ERJ-2RKF1403X  [RESC1005X40N]  228.47,59.82 180 bottom
R197  ERJ-2RKF1403X  [RESC1005X40N]  235.2,59.82 180 bottom
R198  ERJ-2RKF1403X  [RESC1005X40N]  221.87,60.07 180 bottom
R200  ERJ-2RKF1403X  [RESC1005X40N]  66.55,81.28 0 bottom
R201  RCS04020000Z0ED  [RESC1005X40N]  168.4,131.95 0 bottom
R202  ERJ-2RKF1403X  [RESC1005X40N]  73.15,77.6 270 bottom
R203  RCS04020000Z0ED  [RESC1005X40N]  168.4,130.68 0 bottom
R204  ERJ-2RKF1403X  [RESC1005X40N]  82.93,84.58 90 bottom
R205  RCS04020000Z0ED  [RESC1005X40N]  168.4,129.41 0 bottom
R206  ERJ-2RKF1403X  [RESC1005X40N]  199.52,81.15 0 bottom
R207  RCS04020000Z0ED  [RESC1005X40N]  168.4,128.14 0 bottom
R208  ERJ-2RKF1403X  [RESC1005X40N]  206.5,77.47 270 bottom
R209  RCS04020000Z0ED  [RESC1005X40N]  168.4,126.87 0 bottom
R210  ERJ-2RKF1403X  [RESC1005X40N]  216.03,83.31 270 bottom
R211  RCS04020000Z0ED  [RESC1005X40N]  168.4,125.6 0 bottom
R212  CRCW0402100KFKEDC  [RESC1005X35N]  228.47,57.91 0 bottom
R213  CRCW0402100KFKEDC  [RESC1005X35N]  235.2,57.91 0 bottom
R214  CRCW0402100KFKEDC  [RESC1005X35N]  221.87,58.04 0 bottom
R216  CRCW0402100KFKEDC  [RESC1005X35N]  62.74,81.66 90 bottom
R218  CRCW0402100KFKEDC  [RESC1005X35N]  73.66,73.53 180 bottom
R220  CRCW0402100KFKEDC  [RESC1005X35N]  86.23,86.87 180 bottom
R221  RCS04020000Z0ED  [RESC1005X40N]  167.89,94.74 0 bottom
R222  CRCW0402100KFKEDC  [RESC1005X35N]  195.83,81.53 90 bottom
R224  CRCW0402100KFKEDC  [RESC1005X35N]  206.5,74.8 180 bottom
R226  CRCW0402100KFKEDC  [RESC1005X35N]  216.79,80.64 180 bottom
R227  RCS04020000Z0ED  [RESC1005X40N]  107.44,140.46 180 bottom
R229  RCS04020000Z0ED  [RESC1005X40N]  107.44,126.49 180 bottom
R230  RCS04020000Z0ED  [RESC1005X40N]  107.44,127.76 180 bottom
R231  RCS04020000Z0ED  [RESC1005X40N]  107.44,129.03 180 bottom
R232  RCS04020000Z0ED  [RESC1005X40N]  107.44,130.3 180 bottom
R233  RCS04020000Z0ED  [RESC1005X40N]  107.44,131.57 180 bottom
R234  RCS04020000Z0ED  [RESC1005X40N]  107.44,132.84 180 bottom
R235  RCS04020000Z0ED  [RESC1005X40N]  107.44,134.11 180 bottom
R236  RCS04020000Z0ED  [RESC1005X40N]  107.44,135.38 180 bottom
R237  RCS04020000Z0ED  [RESC1005X40N]  107.44,136.65 180 bottom
R238  RCS04020000Z0ED  [RESC1005X40N]  107.44,137.92 180 bottom
R239  RCS04020000Z0ED  [RESC1005X40N]  107.44,139.19 180 bottom
R240  RCS04020000Z0ED  [RESC1005X40N]  114.17,99.19 180 bottom
R241  RCS04020000Z0ED  [RESC1005X40N]  114.17,100.46 180 bottom
R242  RCS04020000Z0ED  [RESC1005X40N]  114.17,101.73 180 bottom
R243  RCS04020000Z0ED  [RESC1005X40N]  114.17,103 180 bottom
R244  RCS04020000Z0ED  [RESC1005X40N]  114.17,104.27 180 bottom
R245  RCS04020000Z0ED  [RESC1005X40N]  114.17,105.54 180 bottom
R246  RCS04020000Z0ED  [RESC1005X40N]  114.17,106.81 180 bottom
R247  RCS04020000Z0ED  [RESC1005X40N]  114.17,108.08 180 bottom
R248  RCS04020000Z0ED  [RESC1005X40N]  114.17,109.35 180 bottom
R249  RCS04020000Z0ED  [RESC1005X40N]  114.17,110.62 180 bottom
R250  RCS04020000Z0ED  [RESC1005X40N]  114.17,111.89 180 bottom
R251  RCS04020000Z0ED  [RESC1005X40N]  114.17,113.16 180 bottom
SG_BUSY_1  RCS04020000Z0ED  [RESC1005X40N]  175.13,92.2 270 bottom
SG_BUSY_2  RCS04020000Z0ED  [RESC1005X40N]  174.12,124.71 90 bottom
STRAIN_GAUGE_5V  LM1085IS-5.0_NOPB  [TO254P1435X464-4N]  119.51,199.52 25.9 bottom
STRAINGAUGE_1  ADS8588HIPM  [QFP50P1200X1200X160-64N]  177.93,102.62 90 bottom
STRAINGGAUGE_2  ADS8588HIPM  [QFP50P1200X1200X160-64N]  178.31,133.86 90 bottom
U$1  TEST_POINT  [TEST_PAD]  116.08,206.38 61.4 top
U$2  TEST_POINT  [TEST_PAD]  119.38,212.47 61.4 top
U$3  TEST_POINT  [TEST_PAD]  122.81,218.82 61.4 top
U$4  TEST_POINT  [TEST_PAD]  126.24,225.3 61.4 top
U$5  TEST_POINT  [TEST_PAD]  112.78,200.41 61.4 top
U$6  TEST_POINT  [TEST_PAD]  109.35,193.93 61.4 top
U$7  TEST_POINT  [TEST_PAD]  106.05,187.71 61.4 top
U$8  TEST_POINT  [TEST_PAD]  102.74,181.74 61.4 top
U$9  TEST_POINT  [TEST_PAD]  99.44,175.9 61.4 top
U$10  TEST_POINT  [TEST_PAD]  96.14,169.67 61.4 top
U$11  TEST_POINT  [TEST_PAD]  92.84,163.7 241.4 top
U$12  TEST_POINT  [TEST_PAD]  89.53,157.61 61.4 top
Z1  AS_FEMALE_5_PIN  [AS_FEMALE_5_PIN]  8,0.13 0 top
Z2  AS_FEMALE_5_PIN  [AS_FEMALE_5_PIN]  34.8,0.13 0 top
Z3  AS_FEMALE_5_PIN  [AS_FEMALE_5_PIN]  61.59,0.13 0 top
Z4  AS_FEMALE_5_PIN  [AS_FEMALE_5_PIN]  88.39,0.13 0 top
Z5  AS_FEMALE_5_PIN  [AS_FEMALE_5_PIN]  115.19,0.13 0 top
Z6  AS_FEMALE_5_PIN  [AS_FEMALE_5_PIN]  141.99,0.13 0 top
Z7  AS_FEMALE_5_PIN  [AS_FEMALE_5_PIN]  168.78,0.13 0 top
Z8  AS_FEMALE_5_PIN  [AS_FEMALE_5_PIN]  195.58,0.13 0 top
Z9  AS_FEMALE_5_PIN  [AS_FEMALE_5_PIN]  222.38,0.13 0 top
Z10  AS_FEMALE_5_PIN  [AS_FEMALE_5_PIN]  249.17,0.13 0 top
Z11  AS_FEMALE_5_PIN  [AS_FEMALE_5_PIN]  21.34,23.37 0 top
Z12  AS_FEMALE_5_PIN  [AS_FEMALE_5_PIN]  48.13,23.37 0 top
Z13  AS_FEMALE_5_PIN  [AS_FEMALE_5_PIN]  74.93,23.37 0 top
Z14  AS_FEMALE_5_PIN  [AS_FEMALE_5_PIN]  182.12,23.37 0 top
Z15  AS_FEMALE_5_PIN  [AS_FEMALE_5_PIN]  208.91,23.37 0 top
Z16  AS_FEMALE_5_PIN  [AS_FEMALE_5_PIN]  235.71,23.37 0 top
Z17  AS_FEMALE_5_PIN  [AS_FEMALE_5_PIN]  101.73,23.37 0 top
Z18  AS_FEMALE_5_PIN  [AS_FEMALE_5_PIN]  128.52,23.37 0 top
Z19  AS_FEMALE_5_PIN  [AS_FEMALE_5_PIN]  155.32,23.37 0 top
Z20  AS_FEMALE_5_PIN  [AS_FEMALE_5_PIN]  48.01,69.85 0 top
Z21  AS_FEMALE_5_PIN  [AS_FEMALE_5_PIN]  74.8,69.85 0 top
Z22  AS_FEMALE_5_PIN  [AS_FEMALE_5_PIN]  101.6,69.85 0 top
Z23  AS_FEMALE_5_PIN  [AS_FEMALE_5_PIN]  128.4,69.85 0 top
Z24  AS_FEMALE_5_PIN  [AS_FEMALE_5_PIN]  155.19,69.85 0 top
Z25  AS_FEMALE_5_PIN  [AS_FEMALE_5_PIN]  181.99,69.85 0 top
Z26  AS_FEMALE_5_PIN  [AS_FEMALE_5_PIN]  208.79,69.85 0 top
Z27  AS_FEMALE_5_PIN  [AS_FEMALE_5_PIN]  61.34,93.09 0 top
Z28  AS_FEMALE_5_PIN  [AS_FEMALE_5_PIN]  195.33,93.09 0 top
Z29  AS_FEMALE_5_PIN  [AS_FEMALE_5_PIN]  34.67,46.61 0 top
Z30  AS_FEMALE_5_PIN  [AS_FEMALE_5_PIN]  61.47,46.61 0 top
Z31  AS_FEMALE_5_PIN  [AS_FEMALE_5_PIN]  88.27,46.61 0 top
Z32  AS_FEMALE_5_PIN  [AS_FEMALE_5_PIN]  115.06,46.61 0 top
Z33  AS_FEMALE_5_PIN  [AS_FEMALE_5_PIN]  141.86,46.61 0 top
Z34  AS_FEMALE_5_PIN  [AS_FEMALE_5_PIN]  168.66,46.61 0 top
Z35  AS_FEMALE_5_PIN  [AS_FEMALE_5_PIN]  195.45,46.61 0 top
Z36  AS_FEMALE_5_PIN  [AS_FEMALE_5_PIN]  222.25,46.61 0 top